# Altium PCB ESP32C6_module.PcbDoc (part 1 of 2)
Units mm, origin at the board's own origin, x right, y up, seen from the top; angles counter-clockwise.
Board outline 36.3 x 28.14 mm, 4 copper layers (TOP, GND, VCC, BOT), stack 1.586 mm thick; 77 components, 53 nets, 289 pads, 241 vias.
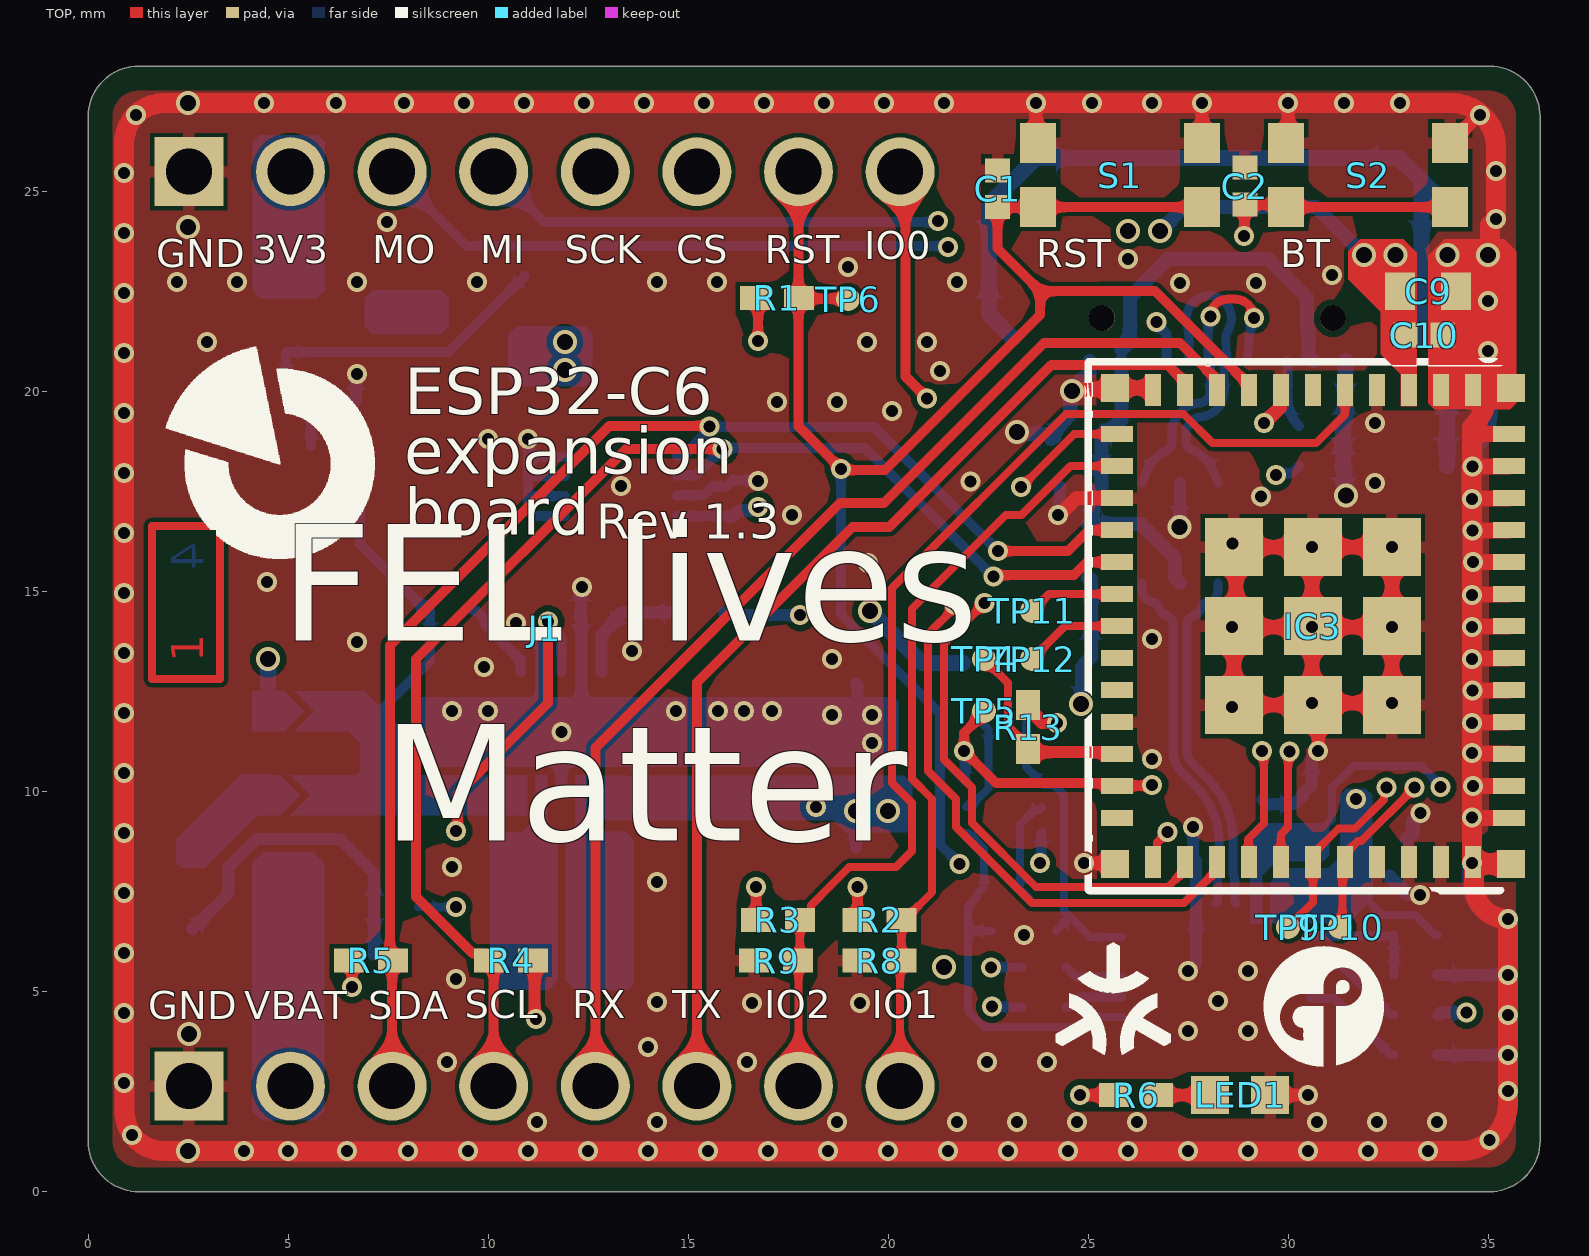
[diagram p0: TOP view]
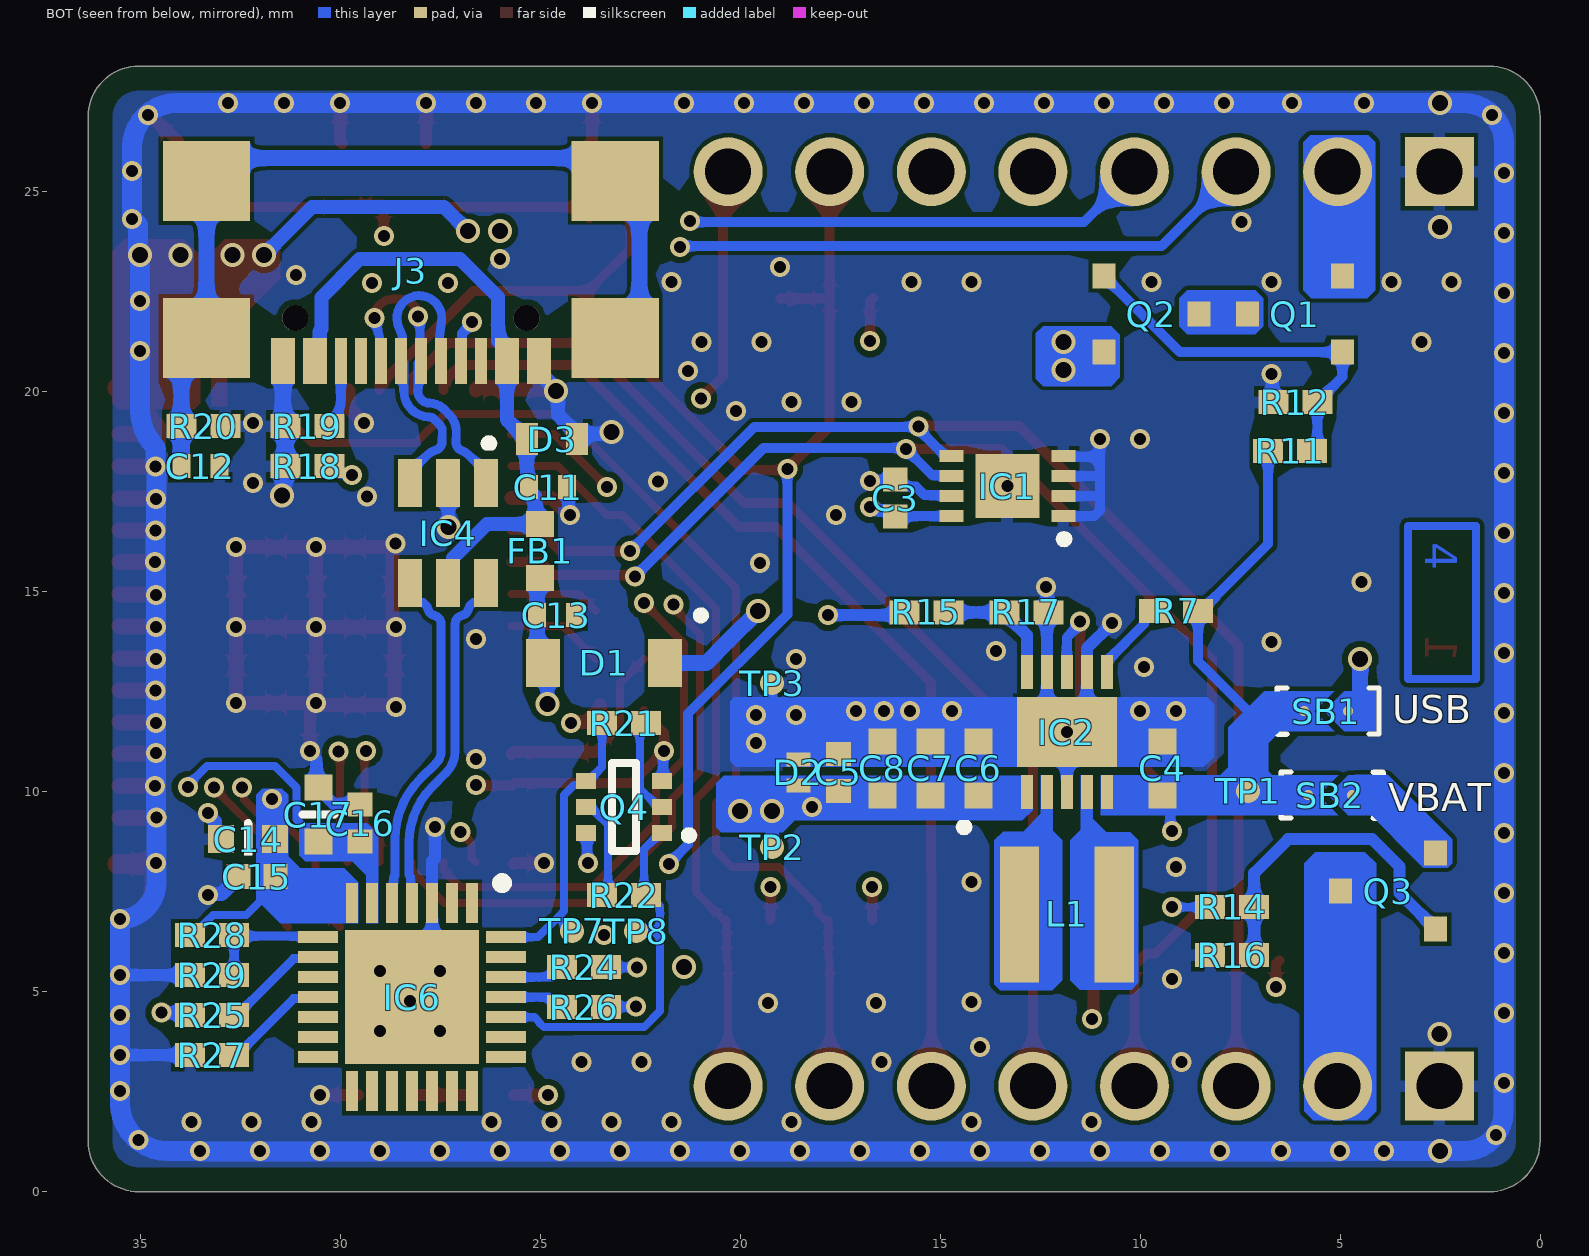
[diagram p1: BOT view, seen from below]
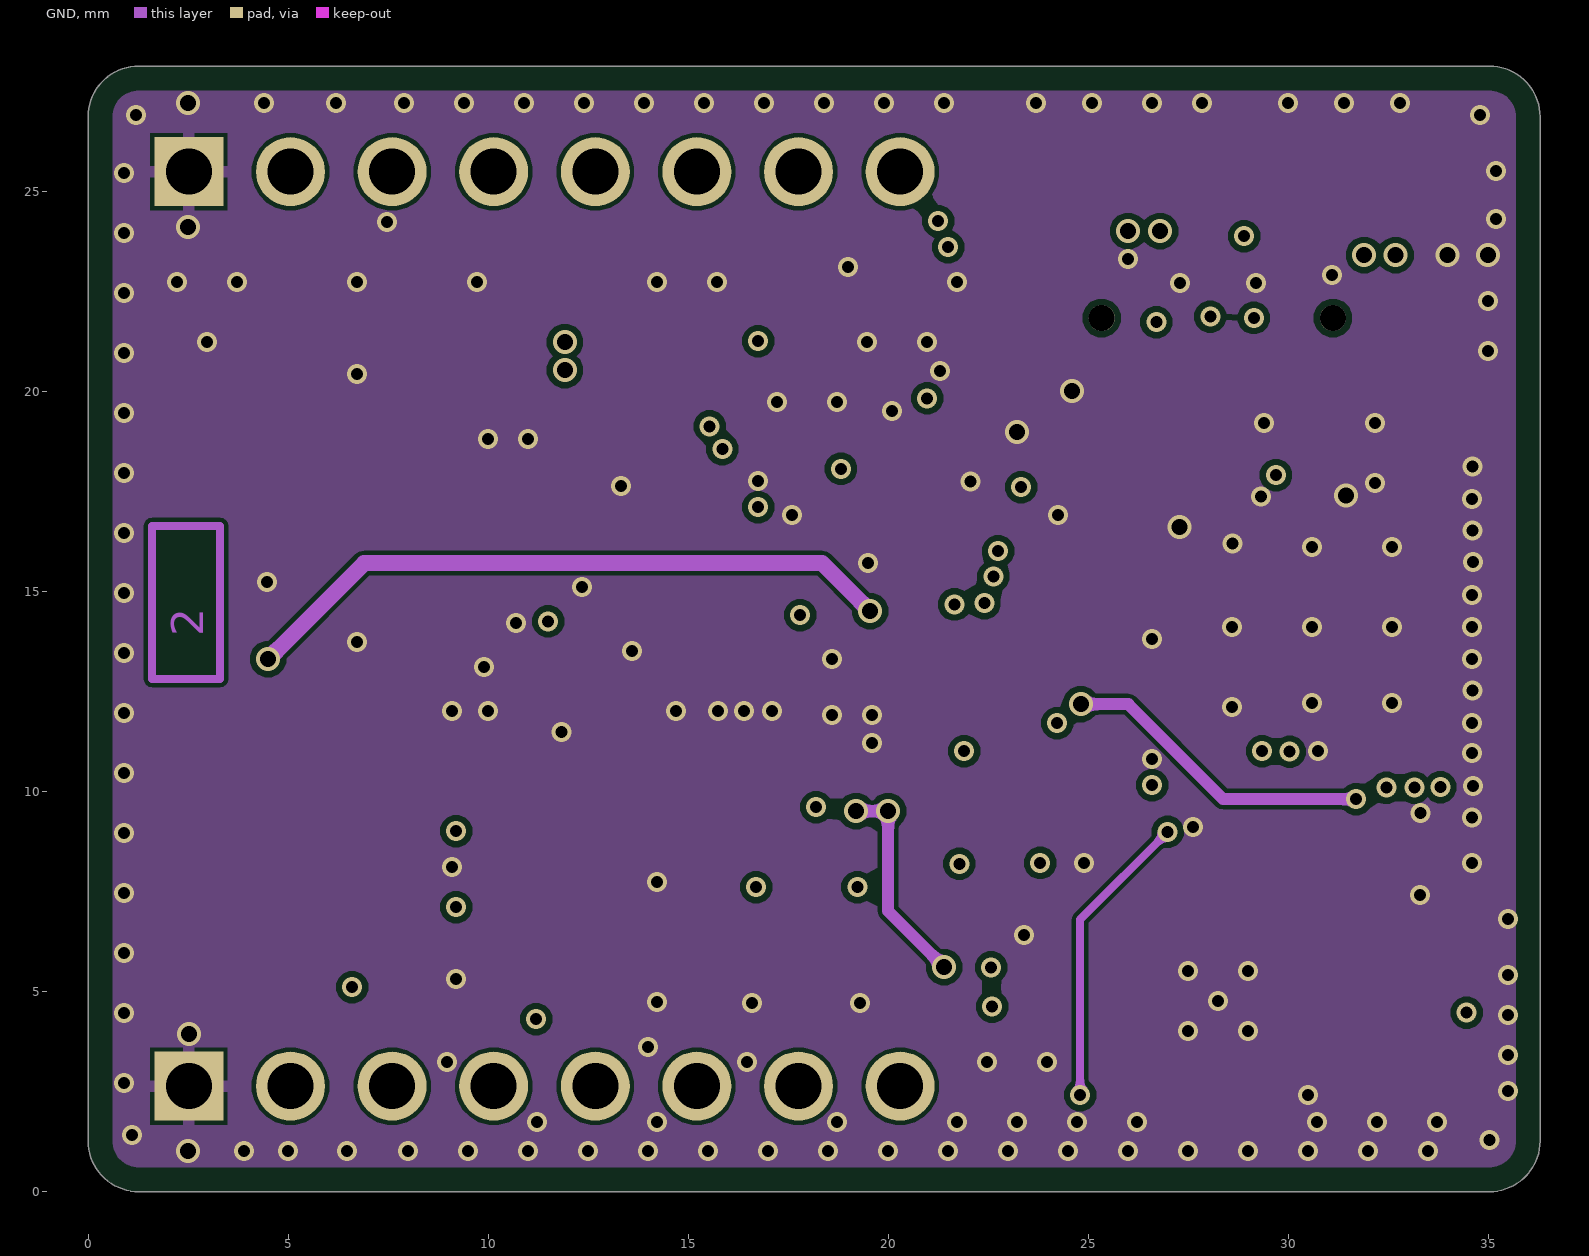
[diagram p2: GND]
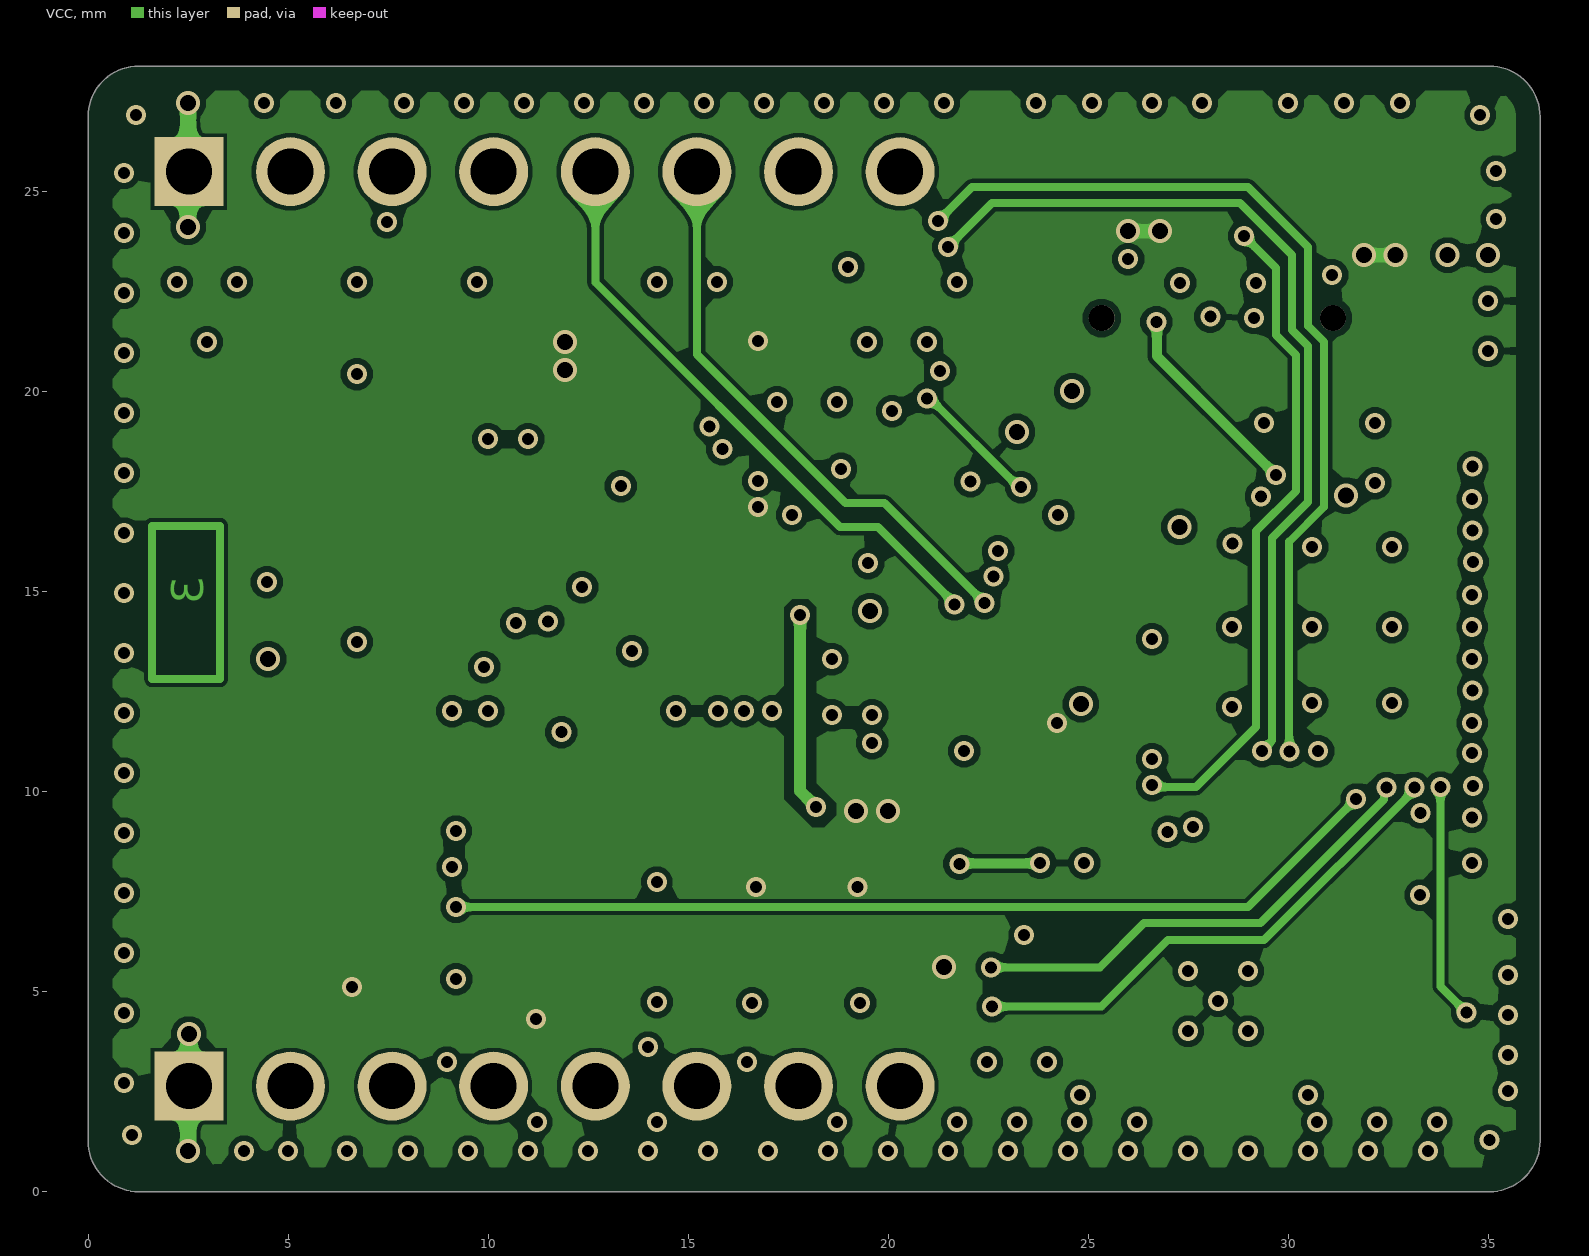
[diagram p3: VCC]

## Layer stack, top to bottom
Top Solder: solder mask 0.01, Solder Resist, Dk 3.5
TOP: signal copper 0.035
Dielectric 2: prepreg 0.2104, PP-006, Dk 4.1
GND: signal copper 0.0152
Dielectric 1: dielectric 1.065, FR-4, Dk 4.8
VCC: signal copper 0.0152
Dielectric 3: prepreg 0.2104, PP-006, Dk 4.1
BOT: signal copper 0.035
Bottom Solder: solder mask 0.01, Solder Resist, Dk 3.5

## Board outline
0,1.255 ccw(c1.27,1.255) 1.27,-0.015 35.03,-0.015 ccw(c35.03,1.255) 36.3,1.255 36.3,26.855 ccw(c35.03,26.855) 35.03,28.125 1.27,28.125 ccw(c1.27,26.855) 0,26.855

## Design rules (kind name [scope] priority, off if disabled: settings)
BoardOutlineClearance BoardOutlineClearance_ESP [HasFootprint('ESP32C6MINI1H8') Or HasFootprint('USB4110GFA')] p1: gap=0 ignorepadtopadclearanceinfootprint=FALSE
BoardOutlineClearance [All] p2: gap=0.2 ignorepadtopadclearanceinfootprint=FALSE except(0.6: Poly-OutlineEdge Region-OutlineEdge)
Clearance Clearance_USB [HasFootprint('GCT_USB4110GFA')] p1: gap=0.102 ignorepadtopadclearanceinfootprint=FALSE except(0.127: Arc-Via Track-Via SMDPad-Via THPad-Via Via-Via Via-Fill Via-Poly Via-Region Via-Text; 0.15: Arc-Hole Track-Hole SMDPad-Hole THPad-Hole Via-Hole Fill-Hole Poly-Hole Region-Hole Text-Hole)
Clearance [All] p2: gap=0.102 ignorepadtopadclearanceinfootprint=FALSE except(0.127: Arc-Via Track-Via SMDPad-Via THPad-Via Via-Via Via-Fill Via-Poly Via-Region Via-Text; 0.25: Arc-Hole Track-Hole SMDPad-Hole THPad-Hole Via-Hole Fill-Hole Poly-Hole Region-Hole Text-Hole)
ComponentClearance [All] p1: gap=0.102 collisioncheckmode=3 verticalgap=0.102 showdistances=TRUE
DiffPairsRouting [InDifferentialPairClass('USB')] p1: maxlimit=0.127 minlimit=0.102 mostfreqgap=0.127 toplayer_mingap=0.127 toplayer_minwidth=0.222 toplayer_maxwidth=0.222 toplayer_prefwidth=0.222 bottomlayer_mingap=0.127 bottomlayer_minwidth=0.222 bottomlayer_maxwidth=0.222 bottomlayer_prefwidth=0.222 impedanceprofiledriven=TRUE impedanceprofileid={F1036F3F-17FF-486A-911F-16CA4747983C} impedanceprofilevalue=90.000000 maxuncoupledlength=12.7
Height [All] p1: minheight=0 maxheight=1816.048 prefheight=12.7
HoleSize [All] p1: absolutevalues=TRUE maxlimit=6.3 minlimit=0.2 maxpercent=80.000 minpercent=20.000
HoleToHoleClearance [All] p1: gap=0.25 allowstackedmicrovias=FALSE
MinimumAnnularRing [All] p1: minimumring=0.076
MinimumSolderMaskSliver [All] p1: minsoldermaskwidth=0
PlaneClearance [All] p1: clearance=0.102
PlaneConnect PlaneConnectPowerPads [InPadClass('PowerPads')] p1: planeconnectstyle=Direct reliefexpansion=0.508 reliefentries=4 reliefconductorwidth=0.254 reliefairgap=0.254
PlaneConnect [All] p2: pad.planeconnectstyle=Relief pad.reliefexpansion=0.3 pad.reliefentries=4 pad.reliefconductorwidth=0.3 pad.reliefairgap=0.102 via.planeconnectstyle=Direct via.reliefexpansion=0.3 via.reliefentries=4 via.reliefconductorwidth=0.127 via.reliefairgap=0.127
PolygonConnect PolygonConnectPowerPads [All vs (InPadClass('PowerPads'))] p1: connectstyle=Direct reliefconductorwidth=0.254 reliefentries=4 polygonreliefangle="90 Angle" airgapwidth=0.254
PolygonConnect [All] p2: thpad.connectstyle=Relief thpad.reliefconductorwidth=0.3 thpad.reliefentries=4 thpad.polygonreliefangle="90 Angle" thpad.airgapwidth=0.102 smdpad.connectstyle=Relief smdpad.reliefconductorwidth=0.3 smdpad.reliefentries=4 smdpad.polygonreliefangle="90 Angle" smdpad.airgapwidth=0.102 via.connectstyle=Direct via.reliefconductorwidth=0.127 via.reliefentries=4 via.polygonreliefangle="90 Angle" via.airgapwidth=0.127
RoutingVias [All] p1: holewidth=0.2 width=0.45 viastyle="Through Hole" minholewidth=0.2 minwidth=0.45 maxholewidth=6.3 maxwidth=6.55
SilkToSilkClearance [All] p1: silktosilkclearance=0
SilkToSolderMaskClearance [IsPad] p1: minsilkscreentomaskgap=0.102 clearancetoexposedcopper=TRUE
SolderMaskExpansion [All] p1: expansion=0.075 istentingtop=FALSE
SupplyNets "Schematic Supply Nets_7" [InNet('STAB_3V3')] p1: voltage=0.000
SupplyNets "Schematic Supply Nets_6" [InNet('P3V3')] p2: voltage=0.000
SupplyNets "Schematic Supply Nets_5" [InNet('VBAT')] p3: voltage=0.000
SupplyNets "Schematic Supply Nets_3" [InNet('GND')] p4: voltage=0.000
SupplyNets "Schematic Supply Nets_2" [InNet('VBUS')] p5: voltage=0.000
SupplyNets "Schematic Supply Nets_1" [InNet('+5V')] p6: voltage=0.000
SupplyNets "Schematic Supply Nets" [InNet('3V3_IN')] p7: voltage=0.000
Width [All] p1: maxlimit=1816.048 minlimit=0.102 preferedwidth=0.102
20 further rules are at their usual default settings.

## Classes and differential pairs
component class U_Power: C4 C5 C6 C7 C8 D1 D2 IC2 L1 Q1 Q2 Q3 R7 R11 R12 R14 R15 R16 R17 SB1 SB2 TP1 TP2 TP3
differential pair class USB: USB1 USB2
net class USB: USB1_N USB1_P USB2_N USB2_P
component class U_USB-C: C11 C12 C13 C14 C15 C16 C17 D3 FB1 IC4 IC6 J3 R18 R19 R20 R24 R25 R26 R27 R28 R29
component class U_EEPROM_ID: C3 IC1
component class U_ESP32C6: C9 C10 IC3 Q4 R13 R21 R22 TP4 TP5 TP6 TP7 TP8 TP9 TP10 TP11 TP12
component class main: C1 C2 J1 LED1 R1 R2 R3 R4 R5 R6 R8 R9 S1 S2
differential pair USB2: +USB2_P -USB2_N
differential pair USB1: +USB1_P -USB1_N

## Components (designator, comment, footprint, x,y, rotation, side; value= is the part's Value field where it differs from the comment)
C1 "100nF" CAPC1005X70N 22.736,25.06 r270 top
C2 "100nF" CAPC1005X70N 28.919,25.125 r270 top
C3 "100nF" CAPC1005X70N 16.12,17.325 r270 bottom
C4 "10uF" GRM18X 9.444,10.566 r90 bottom
C5 "100nF" CAPC1005X70N 17.544,10.466 r270 bottom
C6 "10uF" GRM18X 14.044,10.566 r90 bottom
C7 "10uF" GRM18X 15.244,10.566 r90 bottom
C8 "10uF" GRM18X 16.444,10.566 r90 bottom
C9 "4.7uF" CAPC1608X90N 33.5,22.5 r0 top
C10 "100nF" CAPC1005X70N 33.4,21.4 r180 top
C11 "470nF" GRM15X 24.8,17.6 r0 bottom
C12 "10nF" GRM15X 33.495,18.125 r180 bottom
C13 "470nF" GRM15x 24.6,14.4 r0 bottom
C14 "10uF" GRM18x 32.3,8.8 r0 bottom
C15 "100nF" CAPC1005X70N 32.078,7.863 r180 bottom
C16 "100nF" CAPC1005X70N 29.5,9.2 r270 bottom
C17 "10uF" GRM18x 30.54,9.413 r90 bottom
D1 "RB168MM-40TFTR" RB168MM40TFTR 23.4,13.2 r270 bottom
D2 "SP3205-01ETG" SP320501ETG 18.544,10.466 r90 bottom
D3 "ESDA25P35-1U1M" ESDA25P351U1M 24.7,18.8 r0 bottom
FB1 "33R" BLM18SP221SN1B 25,16 r270 bottom
IC1 "M24C02-FMC6TG" M24C02FMC6TG 13.32,17.625 r90 bottom
IC2 "STBB1-APUR" SON50P300X300X100-11N-D 11.831,11.472 r90 bottom
IC3 "ESP32-C6-MINI-1-H8" ESP32C6MINI1H8 33.32,14.125 r270 top
IC4 "USBLC6-2SC6" SOT95P280X145-6N 27.3,16.45 r270 bottom
IC6 "CP2102N-A02-GQFN28R" QFN50P500X500X80-29N-D 28.2,4.85 r270 bottom
J1 "MicroBUS_conn" MICROBUS_HEADER 2.52,2.625 r0 top locked
J3 "USB4110GFA" GCT_USB4110GFA 28.23,21.825 r0 bottom
L1 "2.2uH" FP-XFL4020-MFG 11.831,6.919 r0 bottom
LED1 "150060GS75000" LEDC1608X80N 28.8,2.4 r180 top
Q1 "SSM3J358R,LF" SOTFL95P240X88-3N 6.132,21.925 r0 bottom
Q2 "SSM3J358R,LF" SOTFL95P240X88-3N 9.72,21.925 r180 bottom
Q3 "SSM3J358R,LF" SOTFL95P240X88-3N 3.8,7.5 r0 bottom
Q4 "BC847BDW1T1G" ONSC-SOT-363-6-419B-02_W_V 22.9,9.6 r0 bottom
R1 "100k" RESC1005X35N 17.22,22.325 r0 top
R2 "DNP" RESC1005X40N 19.785,6.78 r180 top
R3 "DNP" RESC1005X40N 17.245,6.78 r180 top
R4 "DNP" RESC1005X35N 10.57,5.764 r0 top
R5 "DNP" RESC1005X35N 7.07,5.764 r180 top
R6 "1k" RESC1005X35N 26.2,2.4 r0 top
R7 "1k" RESC1005X35N 9.1,14.5 r180 bottom
R8 "1M" RESC1005X40N 19.785,5.764 r0 top
R9 "1M" RESC1005X40N 17.201,5.764 r0 top
R11 "1k" RESC1005X35N 6.25,18.5 r180 bottom
R12 "1M" RESC1005X40N 6.12,19.725 r180 bottom
R13 "10k" RESC1005X35N 23.5,11.6 r270 top
R14 "1k" RESC1005X35N 7.7,7.1 r180 bottom
R15 "560k" RESC1005X40N 15.344,14.466 r0 bottom
R16 "1M" RESC1005X40N 7.7,5.9 r180 bottom
R17 "100k" RESC1005X40N 12.844,14.466 r180 bottom
R18 "5.1k" RESC1005X35N 30.82,18.125 r180 bottom
R19 "5.1k" RESC1005X35N 30.82,19.125 r180 bottom
R20 "1M" RESC1005X40N 33.42,19.125 r180 bottom
R21 "10k" RESC1005X35N 22.9,11.7 r0 bottom
R22 "10k" RESC1005X35N 22.9,7.4 r180 bottom
R24 "1k" RESC1005X35N 23.9,5.6 r0 bottom
R25 "1k" RESC1005X35N 33.2,4.4 r0 bottom
R26 "1k" RESC1005X35N 23.9,4.6 r0 bottom
R27 "NC" RESC1005X35N 33.2,3.4 r0 bottom
R28 "100k" RESC1005X40N 33.2,6.4 r180 bottom
R29 "330k" RESC1005X40N 33.2,5.4 r180 bottom
S1 "KMR731NG_LFS" KMR731NGLFS 25.8,25.4 r180 top
S2 "KMR731NG_LFS" KMR731NGLFS 32,25.4 r180 top
SB1 "SB_ON" SOLDER-BRIDGE_R0603-0R 5.3,12 r0 bottom value=0R
SB2 "SB_ON" SOLDER-BRIDGE_R0603-0R 5.2,9.9 r0 bottom value=0R
TP1 "TPAD6R" TP06R#1 7.3,10 r180 bottom
TP2 "TPAD6R" TP06R#2 19.2,8.6 r90 top
TP3 "TPAD6R" TP06R#2 19.2,12.7 r90 top
TP4 "TPAD6R" TP06R#1 22.4,13.3 r90 top
TP5 "TPAD6R" TP06R#1 22.4,12 r90 top
TP6 "TPAD6R" TP06R#1 19,22.3 r90 top
TP7 "TPAD6R" TP06R#3 24.2,6.6 r90 top
TP8 "TPAD6R" TP06R#2 22.6,6.5 r90 top
TP9 "TPAD6R" TP06R#1 30,6.6 r90 top
TP10 "TPAD6R" TP06R#1 31.3,6.6 r90 top
TP11 "TPAD6R" TP06R#1 23.6,14.5 r90 top
TP12 "TPAD6R" TP06R#1 23.6,13.3 r90 top

## Footprints (in the part's own frame and the unit in brackets; to place one, negate y for a bottom-side part, rotate by r counter-clockwise, add the part's x,y. Pads: shape width x height; smd on the part's side, far side on the other; paste and mask are expansions set on the pad)
BLM18SP221SN1B [mm]
  rect 0.65x0.7 smd: 1(-0.675,0) 2(0.675,0)
  body extent -0.8,-0.4 0.8,0.4, height 0.8
CAPC1005X70N [mm]
  rect 0.6x0.62 smd: 1(-0.46,0) 2(0.46,0)
  body extent -0.5,-0.25 0.5,0.25, height 0.25
CAPC1608X90N [mm]
  rect 0.75x0.94 smd: 1(-0.7,0) 2(0.7,0)
  body extent -0.8,-0.45 0.8,0.45, height 0.8
ESDA25P351U1M [mm]
  rect 0.55x0.8 smd: 1(0.625,0) 2(-0.625,0)
  body extent -0.8,-0.5 0.8,0.5, height 0.57
ESP32C6MINI1H8 [mm]
  rect 0.8x0.4 smd: 3(-5.9,-0.3) 5(-5.9,-1.9) 6(-5.9,-2.7) 8(-5.9,-4.3) 9(-5.9,-5.1) 10(-5.9,-5.9) 25(5.9,-6.7) 26(5.9,-5.9) 27(5.9,-5.1) 28(5.9,-4.3) 29(5.9,-3.5) 30(5.9,-2.7) 31(5.9,-1.9) NC(-5.9,-1.1) NC(-5.9,-3.5) NC(5.9,-1.1) NC(5.9,-0.3) NC(5.9,0.5) NC(5.9,1.3) PGND(-5.9,0.5) PGND(-5.9,1.3) PGND(-5.9,-6.7)
  rect 0.4x0.8 smd: 12(-4.8,-7.6) 13(-4,-7.6) 15(-2.4,-7.6) 16(-1.6,-7.6) 17(-0.8,-7.6) 18(0,-7.6) 19(0.8,-7.6) 20(1.6,-7.6) 22(3.2,-7.6) 23(4,-7.6) 24(4.8,-7.6) NC(2.4,-7.6) PGND(-4.8,2.2) PGND(-4,2.2) PGND(-3.2,2.2) PGND(-3.2,-7.6) PGND(-2.4,2.2) PGND(-1.6,2.2) PGND(-0.8,2.2) PGND(0,2.2) PGND(0.8,2.2) PGND(1.6,2.2) PGND(2.4,2.2) PGND(3.2,2.2) PGND(4,2.2) PGND(4.8,2.2)
  rect 0.7x0.7 smd: PGND(-5.95,2.25) PGND(-5.95,-7.65) PGND(5.95,2.25) PGND(5.95,-7.65)
  rect 1.45x1.45 smd: PGND(-1.975,-0.725) PGND(-1.975,-2.7) PGND(-1.975,-4.675) PGND(0,-0.725) PGND(0,-2.7) PGND(0,-4.675) PGND(1.975,-0.725) PGND(1.975,-2.7) PGND(1.975,-4.675)
  silkscreen extent -6.7,-8.4 6.7,2.08, body extent -6.6,-8.3 6.6,8.3, height 2.55
FP-XFL4020-MFG [mm]
  rect 0.98x3.4 smd paste+0 mask+0: 1(-1.185,0) 2(1.185,0)
  body extent -2,-2 2,2, height 2.23
GCT_USB4110GFA [mm]
  rect 0.6x1.15 smd: A1/B12(-3.2,1.075) A4/B9(-2.4,1.075) B1/A12(3.2,1.075) B4/A9(2.4,1.075)
  rect 0.3x1.15 smd: A5(-1.25,1.075) A6(-0.25,1.075) A7(0.25,1.075) A8(1.25,1.075) B5(1.75,1.075) B6(0.75,1.075) B7(-0.75,1.075) B8(-1.75,1.075)
  rect 2.18x2 smd: S1(-5.11,0.5) S2(5.11,0.5) S3(-5.11,-3.43) S4(5.11,-3.43)
  round 0.65 hole 0.65 unplated: ""(-2.89,0) ""(2.89,0)
  body extent -5.65,-6.28 5.65,1.42, height 3.26
GRM15X [mm]
  rect 0.45x0.6 smd: 1(-0.475,0) 2(0.475,0)
  body extent -0.5,-0.28 0.5,0.27, height 0.5
GRM15x [mm]
  rect 0.45x0.6 smd: 1(-0.475,0) 2(0.475,0)
  body extent -0.5,-0.28 0.5,0.27, height 0.5
GRM18X [mm]
  rect 0.65x0.7 smd: 1(-0.675,0) 2(0.675,0)
  body extent -0.8,-0.45 0.8,0.45, height 0.8
GRM18x [mm]
  rect 0.65x0.7 smd: 1(-0.675,0) 2(0.675,0)
  silkscreen extent -0.1,-0.5 0.1,0.4, body extent -0.8,-0.45 0.8,0.45, height 0.8
KMR731NGLFS [mm]
  rect 0.9x1 smd: 1(-2.05,-0.8) 2(2.05,-0.8) 3(2.05,0.8) 4(-2.05,0.8)
  body extent -2.3,-1.4 2.3,1.4, height 2.5
LEDC1608X80N [mm]
  rect 0.95x0.95 smd: 1(-0.75,0) 2(0.75,0)
  body extent -0.83,-0.4 0.77,0.4, height 0.7
M24C02FMC6TG [mm]
  rect 0.3x0.6 smd: 1(-0.75,-1.4) 2(-0.25,-1.4) 3(0.25,-1.4) 4(0.75,-1.4) 5(0.75,1.4) 6(0.25,1.4) 7(-0.25,1.4) 8(-0.75,1.4)
  rect 1.6x1.6 smd: 9(0,0)
  body extent -1,-1.5 1,1.5, height 0.7
MICROBUS_HEADER [mm]
  rect 1.725x1.725 hole 1.15: 1(0,22.86) 9(0,0)
  round 1.725 hole 1.15: 2(2.54,22.86) 3(5.08,22.86) 4(7.62,22.86) 5(10.16,22.86) 6(12.7,22.86) 7(15.24,22.86) 8(17.78,22.86) 10(2.54,0) 11(5.08,0) 12(7.62,0) 13(10.16,0) 14(12.7,0) 15(15.24,0) 16(17.78,0)
  body extent -1.27,-1.27 19.05,24.13, height 2.5
ONSC-SOT-363-6-419B-02_W_V [mm] "SOT23, 6-Leads, Body 2x1.25mm, Pitch 0.65mm"
  rect 0.5x0.4 smd: 1(-0.95,0.65) 2(-0.95,0) 3(-0.95,-0.65) 4(0.95,-0.65) 5(0.95,0) 6(0.95,0.65)
  silkscreen extent -0.3,-1.1 0.3,1.1, body extent -0.63,-1 0.63,1, height 1.1
QFN50P500X500X80-29N-D [mm]
  rect 1x0.3 smd: 1(-2.35,1.5) 2(-2.35,1) 3(-2.35,0.5) 4(-2.35,0) 5(-2.35,-0.5) 6(-2.35,-1) 7(-2.35,-1.5) 15(2.35,-1.5) 16(2.35,-1) 17(2.35,-0.5) 18(2.35,0) 19(2.35,0.5) 20(2.35,1) 21(2.35,1.5)
  rect 0.3x1 smd: 8(-1.5,-2.35) 9(-1,-2.35) 10(-0.5,-2.35) 11(0,-2.35) 12(0.5,-2.35) 13(1,-2.35) 14(1.5,-2.35) 22(1.5,2.35) 23(1,2.35) 24(0.5,2.35) 25(0,2.35) 26(-0.5,2.35) 27(-1,2.35) 28(-1.5,2.35)
  rect 3.35x3.35 smd: 29(0,0)
  silkscreen extent -2.97,2.12 -2.73,2.37, body extent -2.55,-2.55 2.55,2.55, height 0.8
RB168MM40TFTR [mm]
  rect 1.2x0.85 smd: 1(0,1.525) 2(0,-1.525)
  body extent -0.77,-1.72 0.77,1.72, height 0.75
RESC1005X35N [mm]
  rect 0.75x0.6 smd: 1(-0.55,0) 2(0.55,0)
  body extent -0.5,-0.25 0.5,0.25, height 0.35
RESC1005X40N [mm]
  rect 0.75x0.6 smd: 1(-0.55,0) 2(0.55,0)
  body extent -0.5,-0.25 0.5,0.25, height 0.4
SOLDER-BRIDGE_R0603-0R [mil]
  round 10 smd paste-393.7: 1(-19.69,0) 2(23.62,0)
  TOP region: -5.91,19.68 13.78,0 -5.91,-19.68 47.24,-19.68 47.24,19.68 -5.91,19.68
  TOP region: -47.24,-19.68 -47.24,19.68 -15.75,19.68 3.94,0 -15.75,-19.68 -47.24,-19.68
  silkscreen extent -50,-25 53,25, body extent -36,-20 36,20, height 22
SON50P300X300X100-11N-D [mm]
  rect 0.85x0.3 smd: 1(-1.5,1) 2(-1.5,0.5) 3(-1.5,0) 4(-1.5,-0.5) 5(-1.5,-1) 6(1.5,-1) 7(1.5,-0.5) 8(1.5,0) 9(1.5,0.5) 10(1.5,1)
  rect 1.75x2.5 smd: 11(0,0)
  body extent -1.55,-1.5 1.55,1.5, height 1
SOT95P280X145-6N [mm]
  rect 1.2x0.6 smd: 1(-1.25,0.95) 2(-1.25,0) 3(-1.25,-0.95) 4(1.25,-0.95) 5(1.25,0) 6(1.25,0.95)
  body extent -1.4,-1.45 1.4,1.45, height 1.2
SOTFL95P240X88-3N [mm]
  rect 0.575x0.62 smd: 1(-1.188,0.95) 2(-1.188,-0.95) 3(1.188,0)
  body extent -1.2,-1.45 1.2,1.45, height 0.88
SP320501ETG [mm]
  rect 0.35x0.6 smd: 1(-0.325,0) 2(0.325,0)
  body extent -0.5,-0.3 0.5,0.3, height 0.5
TP06R#1 [mm] "Testpoint, round, d=0.6mm"
  round 0.6 smd paste-1: 1(0,0)
TP06R#2 [mm] "Testpoint, round, d=0.6mm"
  round 0.6 smd far side paste-1: 1(0,0)
TP06R#3 [mm] "Testpoint, round, d=0.6mm"
  round 0.6 smd far side paste-1: 1(-0.1,0)

## Part data
C1 C2 C3 C5 C10 C15 C16: library part GRM155R61A104KA01D, "Capacitor", Manufacturer_Name="Murata Electronics", Mouser Part Number=81-GRM155R61A104KA01, Arrow Part Number=GRM155R61A104KA01D, Arrow Price/Stock=https://www.arrow.com/en/products/grm155r61a104ka01d/murata-manufacturing?utm_currency=USD&region=europe, Datasheet Link=https://search.murata.co.jp/Ceramy/image/img/A01X/G101/ENG/GRM155R61A104KA01-02A.pdf, Height=0.7mm, Manufacturer_Part_Number=GRM155R61A104KA01D, Mouser Price/Stock=https://www.mouser.co.uk/ProductDetail/Murata-Electronics/GRM155R61A104KA01D?qs=5bAuhL3RhmNZw0v59AqOJA%3D%3D
C4 C6 C7 C8 C14 C17: library part GRM188R61E106KA73D, "Capacitor", Manufacturer_Name="Murata Electronics", Mouser Part Number=81-GRM188R61E106KA3D, Arrow Part Number=GRM188R61E106KA73D, Arrow Price/Stock=https://www.arrow.com/en/products/grm188r61e106ka73d/murata-manufacturing?region=nac, Datasheet Link=https://search.murata.co.jp/Ceramy/image/img/A01X/G101/ENG/GRM188R61E106KA73-01A.pdf, Height=0.9mm, Manufacturer_Part_Number=GRM188R61E106KA73D, Mouser Price/Stock=https://www.mouser.co.uk/ProductDetail/Murata-Electronics/GRM188R61E106KA73D?qs=5aG0NVq1C4z8ebxPkQZf9A%3D%3D
C9: library part GRM188R61E475KE11J, "Capacitor", Manufacturer_Name="Murata Electronics", Mouser Part Number=81-GRM188R61E475KE1J, Arrow Part Number=GRM188R61E475KE11J, Arrow Price/Stock=https://www.arrow.com/en/products/grm188r61e475ke11j/murata-manufacturing, Datasheet Link=https://search.murata.co.jp/Ceramy/image/img/A01X/G101/ENG/GRM188R61E475KE11-01A.pdf, Height=0.9mm, Manufacturer_Part_Number=GRM188R61E475KE11J, Mouser Price/Stock=https://www.mouser.co.uk/ProductDetail/Murata-Electronics/GRM188R61E475KE11J?qs=hNud%2FORuBR3%2Fa9GLJFT8KA%3D%3D
C11 C13: library part GRM155R61H474KE11J, "Capacitor", Manufacturer_Name="Murata Electronics", Mouser Part Number=81-GRM155R61H474KE1J, Datasheet Link=https://search.murata.co.jp/Ceramy/image/img/A01X/G101/ENG/GRM155R61H474KE11-01A.pdf, Height=0.33mm, Manufacturer_Part_Number=GRM155R61H474KE11J, Mouser Price/Stock=https://www.mouser.co.uk/ProductDetail/Murata-Electronics/GRM155R61H474KE11J?qs=lEfY3O89AqlWLR2W%252BlOiGQ%3D%3D
C12: library part GRM155R71H103KA88D, "Capacitor", Manufacturer_Name="Murata Electronics", Mouser Part Number=81-GRM155R71H103KA8D, Arrow Part Number=GRM155R71H103KA88D, Arrow Price/Stock=https://www.arrow.com/en/products/grm155r71h103ka88d/murata-manufacturing?utm_currency=USD&region=nac, Datasheet Link=https://search.murata.co.jp/Ceramy/image/img/A01X/G101/ENG/GRM155R71H103KA88-01A.pdf, Height=0.33mm, Manufacturer_Part_Number=GRM155R71H103KA88D, Mouser Price/Stock=https://www.mouser.co.uk/ProductDetail/Murata-Electronics/GRM155R71H103KA88D?qs=Dfh4SrgScWxOVlCuzd3ZyQ%3D%3D
D1: "Schottky Diode", Manufacturer_Name="ROHM Semiconductor", Mouser Part Number=755-RB168MM-40TFTR, Datasheet Link=https://www.rohm.com/products/diodes/schottky-barrier-diodes/ultra-low-ir/rb168mm-40tf-product#productDetail, Height=0.9mm, Manufacturer_Part_Number=RB168MM-40TFTR, Mouser Price/Stock=https://www.mouser.co.uk/ProductDetail/ROHM-Semiconductor/RB168MM-40TFTR?qs=4v%252BiZTmLVHGRj2i7xya%2FtQ%3D%3D
D2: "Diode ESD (Uni-directional)", Manufacturer_Name=LITTELFUSE, Mouser Part Number=576-SP3205-01ETG, Arrow Part Number=SP3205-01ETG, Arrow Price/Stock=https://www.arrow.com/en/products/sp3205-01etg/littelfuse?utm_currency=USD&region=nac, Datasheet Link=https://4donline.ihs.com/images/VipMasterIC/IC/LFSI/LFSI-S-A0010724013/LFSI-S-A0010724013-1.pdf?hkey=6D3A4C79FDBF58556ACFDE234799DDF0, Height=0.55mm, Manufacturer_Part_Number=SP3205-01ETG, Mouser Price/Stock=https://www.mouser.co.uk/ProductDetail/Littelfuse/SP3205-01ETG?qs=vHuUswq2%252BswfNhVD4WkB%252BQ%3D%3D
D3: "TVS Diode (Uni-directional)", Manufacturer_Name=STMicroelectronics, Mouser Part Number=511-ESDA25P35-1U1M, Arrow Part Number=ESDA25P35-1U1M, Arrow Price/Stock=https://www.arrow.com/en/products/esda25p35-1u1m/stmicroelectronics?utm_currency=USD&region=europe, Datasheet Link=https://www.st.com/resource/en/datasheet/esda25p35-1u1m.pdf, Height=0.6mm, Manufacturer_Part_Number=ESDA25P35-1U1M, Mouser Price/Stock=https://www.mouser.co.uk/ProductDetail/STMicroelectronics/ESDA25P35-1U1M?qs=aVyJF2WnouQUWqgNP85ZrA%3D%3D
FB1: library part BLM18SG330SN1D, "Ferrite Bead", Manufacturer_Name="Murata Electronics", Mouser Part Number=81-BLM18SG330SN1D, Arrow Part Number=BLM18SG330SN1D, Arrow Price/Stock=https://www.arrow.com/en/products/blm18sg330sn1d/murata-manufacturing, Datasheet Link=http://www.murata.com/~/media/webrenewal/support/library/catalog/products/emc/emifil/c31e.ashx?la=en-gb, Height=0.95mm, Manufacturer_Part_Number=BLM18SG330SN1D, Mouser Price/Stock=https://www.mouser.co.uk/ProductDetail/Murata-Electronics/BLM18SG330SN1D?qs=7EBvPakHacUT88safgvlfQ%3D%3D
IC1: "Integrated Circuit", Manufacturer_Name=STMicroelectronics, Mouser Part Number=511-M24C02-FMC6TG, Arrow Part Number=M24C02-FMC6TG, Arrow Price/Stock=https://www.arrow.com/en/products/m24c02-fmc6tg/stmicroelectronics?region=nac, Datasheet Link=https://www.st.com/resource/en/datasheet/m24c01-r.pdf, Height=0.6mm, Manufacturer_Part_Number=M24C02-FMC6TG, Mouser Price/Stock=https://www.mouser.co.uk/ProductDetail/STMicroelectronics/M24C02-FMC6TG?qs=WHlX%252B%252B9%2FRwB%252BxJ8bQxWbzQ%3D%3D
IC2: "Integrated Circuit", Manufacturer_Name=STMicroelectronics, Mouser Part Number=511-STBB1-APUR, Arrow Part Number=STBB1-APUR, Arrow Price/Stock=https://www.arrow.com/en/products/stbb1-apur/stmicroelectronics?utm_currency=USD&region=nac, Datasheet Link=https://www.st.com/resource/en/datasheet/stbb1-axx.pdf, Height=1mm, Manufacturer_Part_Number=STBB1-APUR, Mouser Price/Stock=https://www.mouser.co.uk/ProductDetail/STMicroelectronics/STBB1-APUR?qs=XoSzFQ8izGZfZqn873o0Mg%3D%3D
IC3: "Integrated Circuit", Manufacturer_Name="Espressif Systems", Mouser Part Number=356-ESP32C6MINI1H8, Datasheet Link=https://www.mouser.ph/ProductDetail/Espressif-Systems/ESP32-C6-MINI-1-H8?qs=olJun0bQHM8q1UR%2FHSWi2A%3D%3D, Height=2.55mm, Manufacturer_Part_Number=ESP32-C6-MINI-1-H8, Mouser Price/Stock=https://www.mouser.co.uk/ProductDetail/Espressif-Systems/ESP32-C6-MINI-1-H8?qs=olJun0bQHM8q1UR%2FHSWi2A%3D%3D
IC4: "Integrated Circuit", Manufacturer_Name=STMicroelectronics, Mouser Part Number=511-USBLC6-2SC6, Arrow Part Number=USBLC6-2SC6, Arrow Price/Stock=https://www.arrow.com/en/products/usblc6-2sc6/stmicroelectronics?utm_currency=USD&region=europe, Datasheet Link=http://www.st.com/st-web-ui/static/active/en/resource/technical/document/datasheet/CD00050750.pdf, Height=1.45mm, Manufacturer_Part_Number=USBLC6-2SC6, Mouser Price/Stock=https://www.mouser.co.uk/ProductDetail/STMicroelectronics/USBLC6-2SC6?qs=po45yt2pPpu%2FhNIlwQdTlg%3D%3D
IC6: "Integrated Circuit", Manufacturer_Name="Silicon Labs", Mouser Part Number=634-CP2102NA02QFN28R, Arrow Part Number=CP2102N-A02-GQFN28R, Arrow Price/Stock=https://www.arrow.com/en/products/cp2102n-a02-gqfn28r/silicon-labs?utm_currency=USD&region=nac, Datasheet Link=https://www.silabs.com/documents/public/data-sheets/cp2102n-datasheet.pdf, Height=0.8mm, Manufacturer_Part_Number=CP2102N-A02-GQFN28R, Mouser Price/Stock=https://www.mouser.co.uk/ProductDetail/Silicon-Labs/CP2102N-A02-GQFN28R?qs=u16ybLDytRag4qKvSH3fTw%3D%3D
J1: "Connector", Manufacturer_Name=Harwin, Manufacturer_Part_Number=M20-9730845, Mouser Part Number=855-M20-9730845, Datasheet Link=https://cdn.harwin.com/pdfs/M20-973.pdf, Height=9.54mm, Mouser Price/Stock=https://www.mouser.co.uk/ProductDetail/Harwin/M20-9730845?qs=%252Bk6%2F5FB6qrnRfgIEPS4Dkw%3D%3D
J3: "USB-C (USB TYPE-C) USB 2.0 Receptacle Connector 24 (16+8 Dummy) Position Surface Mount, Right Angle", Package=None, Check_prices=https://www.snapeda.com/parts/USB4110GFA/Global+Connector+Technology/view-part/?ref=eda, MF="Global Connector Technology", MP=USB4110GFA, SnapEDA_Link=https://www.snapeda.com/parts/USB4110GFA/Global+Connector+Technology/view-part/?ref=snap
L1: library part CMP-2000-05090-4, "INDUCTOR, 2.2UH, 8A, 20%, 38MHZ, REEL", Case/Package=SMD/SMT, DC Resistance (DCR)=23.5mR, Inductance Tolerance=20%, Max DC Current=8A, Max Operating Temperature=125°C, Min Operating Temperature=-40°C, Saturation Current=3.1A, Self Resonant Frequency=38MHz, Test Frequency=100kHz, Core Material=Composite, Height=2.1mm, Inductance=2.2uH, Lead Free="Contains Lead", Length=4.3mm, Mount="Surface Mount", Packaging="Tape and Reel", REACH SVHC="No SVHC", RMS Current (Irms)=8A, RoHS Compliant=Yes, Series=XFL4020, Shielding=Shielded, Termination=SMD/SMT, Tolerance=20%, Width=4.3mm
LED1: "LED", Manufacturer_Name="Wurth Elektronik", Mouser Part Number=710-150060GS75000, Datasheet Link=https://componentsearchengine.com/Datasheets/2/150060GS75000.pdf, Height=0.8mm, Manufacturer_Part_Number=150060GS75000, Mouser Price/Stock=https://www.mouser.co.uk/ProductDetail/Wurth-Elektronik/150060GS75000?qs=LlUlMxKIyB0UYkq5lDO8nA%3D%3D
Q1 Q2 Q3: "MOSFET (P-Channel)", Manufacturer_Name=Toshiba, Mouser Part Number=757-SSM3J358RLF, Arrow Part Number=SSM3J358R,LF, Arrow Price/Stock=https://www.arrow.com/en/products/ssm3j358rlf/toshiba?region=nac, Datasheet Link=https://toshiba.semicon-storage.com/ap-en/product/mosfet/detail.SSM3J358R.html, Height=0.88mm, Manufacturer_Part_Number=SSM3J358R,LF, Mouser Price/Stock=https://www.mouser.co.uk/ProductDetail/Toshiba/SSM3J358RLF?qs=HXFqYaX1Q2xwvCtt1GGmkw%3D%3D
Q4: library part CMP-1048-00875-1, "Dual General Purpose Transistors, NPN, 6-Pin SOT-363, Pb-Free, Tape and Reel", Manufacturer="On Semiconductor", ComponentLink1Description="Manufacturer URL", ComponentLink1URL=http://www.onsemi.com/, ComponentLink2Description=Datasheet, ComponentLink2URL=http://www.onsemi.cn/pub_link/Collateral/BC846BDW1T1-D.PDF, ComponentLink3Description="Package Specification", ComponentLink3URL=http://www.onsemi.com/pub_link/Collateral/NTJD4001N-D.PDF, DatasheetVersion="Rev. 9", fT Min (MHz)=100, IC Continuous (A)=0.1, Mounting Technology="Surface Mount", PackageDescription="6-Pin Small Outline Transistor, Body 2 x 1.25 mm, Pitch 0.65 mm", PackageReference=SOT-363-6-419B-02_W, PackageVersion="Rev. W, 01/2006", Packing="Tape and Reel", PartNumber=BC847BDW1T1G, Polarity="Dual NPN", RoHS=TRUE
R1: library part RT0402FRE07100KL, "Resistor", Manufacturer_Name=KEMET, Mouser Part Number=603-RT0402FRE07100KL, Arrow Part Number=RT0402FRE07100KL, Arrow Price/Stock=https://www.arrow.com/en/products/rt0402fre07100kl/yageo, Datasheet Link=https://www.yageo.com/upload/media/product/productsearch/datasheet/rchip/PYu-RT_1-to-0.01_RoHS_L_11.pdf, Height=0.35mm, Manufacturer_Part_Number=RT0402FRE07100KL, Mouser Price/Stock=https://www.mouser.co.uk/ProductDetail/YAGEO/RT0402FRE07100KL?qs=BXCcY9r%252B08CxTvf5JB1kiw%3D%3D
R2 R3 R8 R9 R12 R16 R20: library part RC0402FR-071ML, "Resistor", Manufacturer_Name=YAGEO, Mouser Part Number=603-RC0402FR-071ML, Arrow Part Number=RC0402FR-071ML, Arrow Price/Stock=https://www.arrow.com/en/products/rc0402fr-071ml/yageo?region=nac, Datasheet Link=https://componentsearchengine.com/Datasheets/2/RC0402FR-071ML.pdf, Height=0.4mm, Manufacturer_Part_Number=RC0402FR-071ML, Mouser Price/Stock=https://www.mouser.co.uk/ProductDetail/YAGEO/RC0402FR-071ML?qs=V1yeUXFNrknfoI4987wfBQ%3D%3D
R4 R5 R18 R19: library part RT0402FRE075K1L, "Resistor", Manufacturer_Name=YAGEO, Datasheet Link=https://www.yageo.com/upload/media/product/app/datasheet/rchip/pyu-rt_1-to-0.01_rohs_l.pdf, Height=0.35mm, Manufacturer_Part_Number=RT0402FRE075K1L, Mouser Part Number=RT0402FRE075K1L, Mouser Price/Stock=https://www.mouser.co.uk/ProductDetail/YAGEO/RT0402FRE07100RL?qs=BXCcY9r%252B08AcvLZjF7vcwQ%3D%3D
R6 R7 R11 R14 R24 R25 R26: library part RT0402FRE071KL, "Resistor", Arrow Part Number=RT0402FRE07100KL, Manufacturer_Name=KEMET, Arrow Price/Stock=https://www.arrow.com/en/products/rt0402fre07100kl/yageo, Datasheet Link=https://www.yageo.com/upload/media/product/productsearch/datasheet/rchip/PYu-RT_1-to-0.01_RoHS_L_11.pdf, Height=0.35mm, Manufacturer_Part_Number=RT0402FRE071KL, Mouser Part Number=RT0402FRE071KL, Mouser Price/Stock=https://www.mouser.co.uk/ProductDetail/YAGEO/RT0402FRE07100KL?qs=BXCcY9r%252B08CxTvf5JB1kiw%3D%3D
R13 R21 R22 R27: library part RT0402FRE0710KL, "Resistor", Arrow Part Number=RT0402FRE07100KL, Manufacturer_Name=KEMET, Mouser Part Number=603-RT0402FRE0710KL, Arrow Price/Stock=https://www.arrow.com/en/products/rt0402fre07100kl/yageo, Datasheet Link=https://cz.mouser.com/datasheet/2/447/PYu_RT_1_to_0_01_RoHS_L_15-3461507.pdf, Height=0.35mm, Manufacturer_Part_Number=RT0402FRE0710KL, Mouser Price/Stock=https://www.mouser.co.uk/ProductDetail/YAGEO/RT0402FRE07100KL?qs=BXCcY9r%252B08CxTvf5JB1kiw%3D%3D
R15: library part RE0402BRE07560KL, "Resistor", Manufacturer_Name=YAGEO, Datasheet Link=https://cz.mouser.com/datasheet/3/508/1/pyu-re_105_rohs_l.pdf, Height=0.4mm, Manufacturer_Part_Number=RE0402BRE07560KL
R17 R28: library part RC0402BR-07100KL, "Resistor", Manufacturer_Name=YAGEO, Datasheet Link=https://cz.mouser.com/datasheet/2/447/PYu_RC_Group_51_RoHS_L_12-3368608.pdf, Height=0.4mm, Manufacturer_Part_Number=RC0402BR-07100KL
R29: library part RC0402BR-07330KL, "Resistor", Manufacturer_Name=YAGEO, Datasheet Link=https://cz.mouser.com/datasheet/2/447/PYu_RC_Group_51_RoHS_L_11-1984063.pdf, Height=0.4mm, Manufacturer_Part_Number=RC0402BR-07330KL
S1 S2: "Switch", Arrow Part Number="KMR731NG LFS", Manufacturer_Name="C & K COMPONENTS", Mouser Part Number=611-KMR731NGLFS, Arrow Price/Stock=https://www.arrow.com/en/products/kmr731nglfs/ck, Datasheet Link=https://www.ckswitches.com/media/1908/kmr7.pdf, Manufacturer_Part_Number="KMR731NG LFS", Mouser Price/Stock=https://www.mouser.com/Search/Refine.aspx?Keyword=611-KMR731NGLFS
SB1 SB2: library part MCD-00071, "Resistor, 0R, SB0603, 5%, 0.1W", Manufacturer=YAGEO, Manufacturer_HQ_COO=Unknown, Manufacturer_Part_Number=RC0603JR-070RL, Package=0603, Component_Country_Of_Origin=China, ComponentLink1URL=http://tunmcdsvn.tun.st.com/Component_Documentation_Library/Trunk/Resistor/YAGEO_RC_Series, ID=2521, Internal_Part_Number=MCD-00071, Order_Code_Digikey=311-0.0GRTR-ND, Order_Code_Farnell=2421846, Order_Code_RS=199-5647, Part_Preference=Recommended, Part_Type=Resistor, ShowFields=YES, Status=Released
TP1 TP2 TP3 TP4 TP5 TP6 TP7 TP8 TP9 TP10 TP11 TP12: library part CMP-00028-00002-2, "0.6mm round", Pins=1

## Via types
v1: diameter 0.5, hole 0.3, TOP to BOT, tented both sides, 203 vias
v2: diameter 0.6, hole 0.4, TOP to BOT, tented both sides, 22 vias
v3: diameter 0.5, hole 0.3, TOP to BOT, 16 vias

## Nets (pads, with @x,y where several pads share a name; then routed paths per layer and width w, separated by ;. In a path a pad name is that pad's centre, name@x,y a point inside that pad or via, vN(x,y) a via of type N, cw(c..) or ccw(c..) an arc to the next point about the centre after c; other vN are vias at no path point)
3V3_IN: J1.2 Q1.2
+5V: C13.2 C14.1 C15.2 D1.2 FB1.2 IC6.7 R14.1 R28.1 | length 40.6
  GND w0.3: v2(24.817,12.173) 26.004,12.173 28.378,9.8 v1(31.7,9.8)
  VCC w0.2: v1(9.2,7.1) 29,7.1 v1(31.7,9.8)
  BOT w0.2: R14.1 v1(9.2,7.1) ; C15.2 C15.2@31.625,7.857 ; v1(31.7,9.8) 31.7,9.719 31.625,9.644 C15.2@31.625,7.857 ; R28.1 33.675,6.4 33.324,6.751 33.173,6.902 32.348,6.902 31.818,7.432 31.818,7.56 31.8,7.578 31.8,7.682 C15.2@31.625,7.857
  BOT w0.3: v2(24.817,12.173) 24.817,13.092 D1.2
  BOT w0.35: D1.2 25.075,13.35 C13.2 25.075,15.25 ccw(c25,15.25) FB1.2
BOOT: C2.2 IC3.23 Q4.3 S2.3 S2.4 TP5.1 | length 29.5
  TOP w0.25: TP5.1 22.4,11.95 21.9,11.45 v1(21.9,11) 22.7,10.2 25.645,10.2 IC3.23 25.732,10.138 26.588,10.138 v1(26.6,10.15) ; v1(28.9,23.875) 28.91,23.885 28.91,24.656 C2.2 29.885,24.665 S2.3 S2.4
  VCC w0.2: v1(26.6,10.15) 26.65,10.1 27.7,10.1 29.2,11.6 29.2,16.5 30.197,17.497 30.197,20.903 29.7,21.4 29.7,23.075 v1(28.9,23.875)
  BOT w0.25: v1(21.9,11) 21.925,10.975 21.925,10.275 Q4.3
CS: IC3.26 J1.6 | length 26.9
  TOP w0.2: v1(22.409,14.702) 21.4,13.694 21.4,10.793 22.1,10.093 22.1,9.2 23.701,7.599 26.993,7.599 27.42,8.025 IC3.26
  VCC w0.2: J1.6 15.22,20.917 18.937,17.2 19.911,17.2 v1(22.409,14.702)
DTR: IC6.28 Q4.4 R21.2 TP7.1 | length 7.5
  BOT w0.2: R21.2 23.45,10.6 23.9,10.15 24.15,10.15 24.4,9.9 24.4,7 24.548,6.852 ; TP7.1 24.548,6.848 24.548,6.852 ; IC6.28 25.5,6.35 25.05,6.35 24.548,6.852
ESP_EN: C1.2 IC3.8 J1.7 Q4.6 R1.2 S1.3 S1.4 TP6.1 | length 44.4
  TOP w0.25: J1.7 R1.2@17.76,22.335 ; v1@18.821,18.025 19.925,18.025 23.8,21.9 23.8,22.5 ; v1(18.821,18.058) 17.76,19.119 R1.2@17.76,22.335 ; TP6.1 18.987,22.313 17.783,22.313 R1.2 R1.2@17.76,22.335 ; S1.3 S1.4 ; S1.3@23.77,24.325 23.495,24.6 C1.2 22.736,23.564 23.8,22.5 ; IC3.8 29.02,20.225 28.945,20.3 28.873,20.3 26.673,22.5 23.8,22.5
  VCC w0.25: v1(21.783,8.183) 21.792,8.192 23.792,8.192 v1(23.804,8.204)
  BOT w0.25: v1(18.821,18.058) 18.821,14.416 21.3,11.937 21.3,8.666 v1(21.783,8.183) ; v1(23.804,8.204) 23.827,8.227 23.827,8.927 Q4.6
FB: IC2.10 R15.1 R17.1 | length 3.2
  BOT w0.3: IC2.10 12.831,13.903 13.169,14.241 13.169,14.316 13.319,14.466 R15.1
GND: C1.1 C2.1 C3.1 C4.2 C5.1 C6.2 C7.2 C8.2 C9.2 C10.1 C11.1 C12.2 C13.1 C14.2 C15.1 C16.1 C17.2 D2.2 D3.2 IC1.1 IC1.2 IC1.3 IC1.4 IC1.7 IC1.9 IC2.3 IC2.7 IC2.9 IC2.11 IC3.NC IC3.PGND IC4.2 IC6.3 IC6.29 J1.1 J1.9 J3.A1/B12 J3.B1/A12 LED1.1 R8.1 R9.1 R12.1 R16.1 R17.2 R18.1 R19.1 R20.2 R27.2 R29.1 S1.1 S1.2 S2.1 S2.2 TP3.1 | length 333
  TOP w0.3: v1(23.7,27.2) 23.7,26.25 S1.2 ; v1(24.9,8.2) 25.61,8.2 cw(c25.61,8.115) IC3.PGND@25.67,8.175 ; IC3.PGND@26.61,20.009 26.607,20.012 IC3.PGND@26.62,20.025 ; S1.1 v1(27.85,27.2) ; LED1.1 v1(30.5,2.4) ; S2.2 30,26.25 v1(30,27.2) ; v3(30.6,12.2) 30.635,12.165 30.75,12.05 v1(30.75,11) ; S2.1 34.05,26.25 34.35,26.55 34.396,26.55 34.746,26.9 v1(34.8,26.9)
  TOP w0.35: v1(24.25,16.902) 24.291,16.902 24.714,17.325 IC3.PGND@25.72,17.325 ; v2(24.6,20) 24.638,20.038 25.632,20.038 25.67,20.075 26.595,20.075 26.607,20.064 IC3.PGND@26.607,20.012 ; v3(28.6,14.1) IC3.PGND@28.645,14.1 ; v3(28.616,16.195) 28.71,16.1 v3(30.6,16.1) ; IC3.PGND@28.695,16.05 28.695,14.175 28.645,14.125 IC3.PGND@28.645,14.1 ; v1(29.396,19.204) 29.404,19.204 29.795,19.595 29.795,20 IC3.NC@29.82,20.025 ; IC3.PGND@30.62,14.125 30.62,14.12 v3(30.6,14.1) ; IC3.PGND@30.62,16.1 v3(30.6,16.1) ; IC3.PGND@30.62,16.1 IC3.PGND@32.595,16.1 ; IC3.PGND@32.595,14.125 IC3.PGND@32.6,14.12 ; IC3.PGND@32.595,16.1 IC3.PGND@32.6,16.095 ; v3(32.6,16.1) IC3.PGND@32.6,16.095 ; IC3.PGND@28.645,14.1 v3(30.6,14.1) ; IC3.PGND@28.645,14.1 28.645,12.15 IC3.PGND@30.62,12.15 ; v3(30.6,14.1) v3(32.6,14.1) ; v3(30.6,14.1) v3(30.6,16.1) ; v3(30.6,14.1) v3(30.6,12.2) 30.6,12.17 IC3.PGND@30.62,12.15 ; IC3.PGND@30.62,12.15 30.635,12.165 30.67,12.2 32.545,12.2 32.595,12.15 32.595,12.195 v3(32.6,12.2) v3(32.6,14.1) ; v3(32.6,14.1) IC3.PGND@32.6,14.12 ; IC3.PGND@32.6,14.12 IC3.PGND@32.6,16.095
  TOP w0.4: v1@34.612,10.938 35.508,10.938 IC3.PGND@35.52,10.925 ; v1@34.613,11.713 35.507,11.713 IC3.PGND@35.52,11.725 ; v1@34.613,13.313 35.507,13.313 IC3.PGND@35.52,13.325 ; v1@34.613,14.113 35.507,14.113 IC3.PGND@35.52,14.125 ; v1@34.613,14.913 35.507,14.913 IC3.PGND@35.52,14.925 ; v1(34.613,16.513) 35.507,16.513 IC3.PGND@35.52,16.525 ; v1@34.613,17.313 35.507,17.313 IC3.PGND@35.52,17.325 ; v1(34.613,18.113) 35.507,18.113 IC3.PGND@35.52,18.125 ; v1@34.615,9.325 IC3.PGND@35.52,9.325 ; v1@34.619,12.519 35.514,12.519 IC3.PGND@35.52,12.525 ; v1(34.625,10.125) IC3.PGND@35.52,10.125 ; v1(34.625,15.725) IC3.PGND@35.52,15.725 ; 34.761,18.925 IC3.PGND@35.52,18.925
  TOP w0.5: v1@3.892,1 v2(2.5,1) 1.9,1 cw(c1.9,1.988) 0.912,1.988 0.912,2.688 v1(0.9,2.7) v1(0.9,4.45) v1(0.9,5.95) v1(0.9,7.45) v1(0.9,8.95) v1(0.9,10.45) v1(0.9,11.95) v1(0.9,13.45) v1(0.9,14.95) v1(0.9,16.45) v1(0.9,17.95) v1(0.9,19.45) v1(0.9,20.95) v1(0.9,22.45) v1(0.9,23.95) v1(0.9,25.45) 0.9,26.2 cw(c1.9,26.2) 1.9,27.2 v2(2.5,27.2) v1(4.4,27.2) v1(6.2,27.2) v1(7.9,27.2) v1(9.4,27.2) v1(10.9,27.2) v1(12.4,27.2) v1(13.9,27.2) v1(15.4,27.2) v1(16.9,27.2) v1(18.4,27.2) v1(19.9,27.2) v1(21.4,27.2) v1(23.7,27.2) v1(25.1,27.2) v1(26.6,27.2) v1(27.85,27.2) v1(30,27.2) v1(31.4,27.2) v1(32.8,27.2) 34.1,27.2 cw(c34.1,26.1) 35.2,26.1 v1(35.2,25.5) v1(35.2,24.3) 35.048,24.148 35.048,23.448 v2(35,23.4) v1(35,22.25) v1(35,21) 35,20.083 cw(c33.634,20.083) 35,20.075 ; v1(3.9,1) v1(5,1) ; v1@5.013,0.987 v1@6.462,0.987 ; v1@6.488,0.987 v1@7.987,0.987 ; v1@8.013,0.987 v1@9.487,0.987 ; v1@9.513,0.987 v1@10.987,0.987 ; v1@11.013,0.987 v1@12.487,0.987 ; v1@12.513,0.987 v1@13.987,0.987 ; v1@14.013,0.987 v1@15.487,0.987 ; v1@15.513,0.987 v1@16.987,0.987 ; v1@17.013,0.987 v1@18.487,0.987 ; v1@18.513,0.987 v1@19.987,0.987 ; v1@20.013,0.987 v1@21.487,0.987 ; v1@21.513,0.987 v1@22.987,0.987 ; v1@23.013,0.987 v1@24.487,0.987 ; v1@24.513,0.987 v1@25.987,0.987 ; v1@26.013,0.987 v1@27.487,0.987 ; v1@27.513,0.987 v1@28.987,0.987 ; v1@29.013,0.987 v1@30.487,0.987 ; v1@30.513,0.987 v1@31.987,0.987 ; v1@32.013,0.987 v1@33.487,0.987 ; v1(33.5,1) 34.304,1 ccw(c34.304,2.196) 35.5,2.196 v1(35.5,2.5) v1(35.5,6.8) cw(c35.5,7.655) 34.645,7.655 IC3.NC@34.645,8.175 ; v1@34.612,10.938 v1(34.6,10.95) ; v1@34.613,13.313 v1(34.6,13.3) ; v1@34.613,14.113 v1(34.6,14.1) ; v1@34.613,14.913 v1(34.6,14.9) ; v1@34.613,17.313 v1(34.6,17.3) ; v1@34.619,12.519 v1(34.613,12.513) ; IC3.PGND@34.62,20.025 34.62,20.05 34.645,20.075 35,20.075 ; 34.761,18.925 cw(c34.761,19.086) 34.6,19.086 ; IC3.PGND@35.57,8.175 34.67,8.175 34.62,8.225 34.6,8.245 34.6,9.341 v1(34.595,9.346) v1(34.595,9.346) 34.597,10.097 v1(34.625,10.125) 34.6,10.15 v1(34.6,10.95) ; IC3.PGND@35.57,20.075 35,20.075 ; v1(34.6,10.95) v1(34.6,11.7) 34.606,11.706 34.606,12.506 v1(34.613,12.513) ; v1(34.6,13.3) v1(34.6,14.1) ; v1(34.6,13.3) 34.6,12.525 v1(34.613,12.513) ; v1(34.6,14.1) v1(34.6,14.9) ; v1(34.6,14.9) 34.6,15.7 v1(34.625,15.725) 34.613,15.738 v1(34.613,16.513) 34.6,16.525 v1(34.6,17.3) ; v1(34.6,17.3) 34.589,17.311 34.589,18.089 v1(34.613,18.113) 34.6,18.125 34.6,19.086 ; 34.6,19.086 ccw(c33.556,20.083) 35,20.075
  VCC w0.4: v2(2.5,1) 2.5,2.605 J1.9 v2(2.52,3.925) ; v2(2.5,24.1) 2.5,25.465 J1.1 2.5,25.505 v2(2.5,27.2)
  BOT w0.25: v1(11,18.8) 11,18.357 ; IC1.1 11.146,16.875 11,17.022 11,17.4 ; IC1.2 11.025,17.375 11,17.4 ; IC1.3 11.025,17.875 11,17.9 ; IC1.4 11.902,18.357 11,18.357 ; IC1.7 14.745,17.4 15.395,17.4 15.605,17.61 15.945,17.61 C3.1 16.123,17.789 16.144,17.768 16.732,17.768 v1(16.75,17.75) ; 11,17.4 11,17.9 ; 11,17.9 11,18.357
  BOT w0.3: R12.1 6.695,19.75 6.695,20.4 v1(6.72,20.425) ; v1(10.7,14.2) 11.331,13.569 11.331,11.972 v3(11.831,11.472) ; IC2.3 v3(11.831,11.472) ; R17.2 12.294,14.353 12.331,14.316 IC2.9 12.331,11.972 v3(11.831,11.472) ; R17.2@12.321,14.494 12.321,15.073 v1(12.348,15.1) ; TP3.1 19.23,12.67 19.23,12.27 v1(19.6,11.9) ; v1(24.25,16.902) 24.288,16.939 24.288,17.562 C11.1 ; v2(27.284,16.604) 27.292,16.612 27.292,17.692 IC4.2 ; v3(27.5,5.5) 27.7,5.7 IC6.3 27.7,8.255 27.628,8.328 v1(27.628,9.105) ; C16.1@29.355,9.795 29.49,9.66 C16.1 ; C16.1@29.51,9.66 29.617,9.66 29.635,9.678 30.16,9.678 30.365,9.883 30.365,9.938 30.515,10.088 C17.2 30.589,10.137 30.589,10.799 30.75,10.959 v1(30.75,11) ; R27.2 v1(35.5,3.4) ; R29.1 v1(35.5,5.4)
  BOT w0.35: v2(23.221,18.979) 23.269,18.931 23.975,18.931 24.075,18.831 D3.2 ; D3.2@24.157,18.855 24.157,19.007 24.552,19.402 24.552,19.952 v2(24.6,20) 24.6,20.045 25.03,20.475 J3.A1/B12 ; C15.1 32.538,7.853 32.963,7.429 33.271,7.429 v1(33.3,7.4) ; C14.2 33.125,8.95 33.125,9.234 33.307,9.417 v1(33.307,9.457)
  BOT w0.4: R19.1 31.37,18.134 31.348,18.111 31.412,18.047 31.412,17.425 v2(31.45,17.387) ; R19.1@31.43,19.27 J3.B1/A12
  BOT w0.5: v1@3.892,1 v2(2.5,1) 1.9,1 cw(c1.9,1.988) 0.912,1.988 0.912,2.688 v1(0.9,2.7) v1(0.9,4.45) v1(0.9,5.95) v1(0.9,7.45) v1(0.9,8.95) v1(0.9,10.45) v1(0.9,11.95) v1(0.9,13.45) v1(0.9,14.95) v1(0.9,16.45) v1(0.9,17.95) v1(0.9,19.45) v1(0.9,20.95) v1(0.9,22.45) v1(0.9,23.95) v1(0.9,25.45) 0.9,26.2 cw(c1.9,26.2) 1.9,27.2 v2(2.5,27.2) v1(4.4,27.2) v1(6.2,27.2) v1(7.9,27.2) v1(9.4,27.2) v1(10.9,27.2) v1(12.4,27.2) v1(13.9,27.2) v1(15.4,27.2) v1(16.9,27.2) v1(18.4,27.2) v1(19.9,27.2) v1(21.4,27.2) v1(23.7,27.2) v1(25.1,27.2) v1(26.6,27.2) v1(27.85,27.2) v1(30,27.2) v1(31.4,27.2) v1(32.8,27.2) 34.1,27.2 cw(c34.1,26.1) 35.2,26.1 v1(35.2,25.5) v1(35.2,24.3) 35.048,24.148 35.048,23.448 v2(35,23.4) v1(35,22.25) v1(35,21) 35,19.531 cw(c33.677,19.531) 34.613,18.596 v1(34.613,18.113) 34.589,18.089 34.589,17.311 v1(34.6,17.3) ; v1(3.9,1) v1(5,1) ; v1@5.013,0.987 v1@6.462,0.987 ; v1@6.488,0.987 v1@7.987,0.987 ; v1@8.013,0.987 v1@9.487,0.987 ; v1@9.513,0.987 v1@10.987,0.987 ; v1@11.013,0.987 v1@12.487,0.987 ; v1@12.513,0.987 v1@13.987,0.987 ; v1@14.013,0.987 v1@15.487,0.987 ; v1@15.513,0.987 v1@16.987,0.987 ; v1@17.013,0.987 v1@18.487,0.987 ; v1@18.513,0.987 v1@19.987,0.987 ; v1@20.013,0.987 v1@21.487,0.987 ; v1@21.513,0.987 v1@22.987,0.987 ; v1@23.013,0.987 v1@24.487,0.987 ; v1@24.513,0.987 v1@25.987,0.987 ; v1@26.013,0.987 v1@27.487,0.987 ; v1@27.513,0.987 v1@28.987,0.987 ; v1@29.013,0.987 v1@30.487,0.987 ; v1@30.513,0.987 v1@31.987,0.987 ; v1@32.013,0.987 v1@33.487,0.987 ; v1(33.5,1) 34.304,1 ccw(c34.304,2.196) 35.5,2.196 v1(35.5,2.5) v1(35.5,3.4) v1(35.5,5.4) v1(35.5,6.8) cw(c35.5,7.705) 34.595,7.705 v1(34.595,9.346) v1(34.595,9.346) 34.597,10.097 v1(34.625,10.125) 34.6,10.15 v1(34.6,10.95) ; v1@34.612,10.938 v1(34.6,10.95) ; v1@34.613,13.313 v1(34.6,13.3) ; v1@34.613,14.113 v1(34.6,14.1) ; v1@34.613,14.913 v1(34.6,14.9) ; v1@34.613,17.313 v1(34.6,17.3) ; v1@34.619,12.519 v1(34.613,12.513) ; v1(34.6,10.95) v1(34.6,11.7) 34.606,11.706 34.606,12.506 v1(34.613,12.513) ; v1(34.6,13.3) 34.6,12.525 v1(34.613,12.513) ; v1(34.6,13.3) v1(34.6,14.1) ; v1(34.6,14.1) v1(34.6,14.9) ; v1(34.6,14.9) 34.6,15.7 v1(34.625,15.725) 34.613,15.738 v1(34.613,16.513) 34.6,16.525 v1(34.6,17.3)
  other v1: 6.475,1 8,1 9.5,1 11,1 12.5,1 14,1 15.5,1 17,1 18.5,1 20,1 21.5,1 23,1 24.5,1 26,1 27.5,1 29,1 30.5,1 32,1 35.036,1.274 1.1,1.4 11.22,1.725 14.22,1.725 18.72,1.725 21.72,1.725 23.22,1.725 24.72,1.725 26.22,1.725 30.72,1.725 32.22,1.725 33.72,1.725 8.97,3.225 16.47,3.225 22.47,3.225 23.97,3.225 14,3.6 35.5,4.4 16.6,4.7 19.3,4.7 14.22,4.725 9.2,5.3 23.4,6.4 14.22,7.725 9.1,8.1 34.6,8.2 26.6,10.8 19.6,11.2 18.6,11.9 9.1,12 10,12 14.7,12 15.75,12.003 16.4,12 17.1,12 9.9,13.1 18.6,13.3 13.6,13.5 6.72,13.725 26.6,13.8 4.47,15.225 19.5,15.7 17.6,16.9 29.324,17.366 32.175,17.7 22.056,17.744 10,18.8 32.175,19.2 20.1,19.5 17.22,19.725 18.72,19.725 21.3,20.5 2.97,21.225 19.47,21.225 20.97,21.225 27.3,22.7 29.2,22.7 2.22,22.725 3.72,22.725 6.72,22.725 9.72,22.725 14.22,22.725 15.72,22.725 21.72,22.725 31.1,22.9 19,23.1 26,23.3 7.47,24.225 1.2,26.9
  other v2: 33.99,23.4
  other v3: 27.5,4 29,4 28.25,4.75 29,5.5 28.6,12.1 13.32,17.625
IO0: IC3.12 J1.8 | length 12.2
  TOP w0.2: v1(23.327,17.6) 24.652,18.925 IC3.12 IC3.12@25.733,18.913
  TOP w0.25: J1.8 20.43,25.355 20.43,20.37 v1(20.979,19.821)
  VCC w0.2: v1(20.979,19.821) 21.042,19.821 23.263,17.6 v1(23.327,17.6)
IO1: IC3.13 J1.16 R2.1 R8.2 | length 19.1
  TOP w0.2: J1.16 20.3,5.729 R8.2 R2.1 20.41,6.78 21.102,7.472 21.102,9.798 20.6,10.3 20.6,14.557 22.943,16.9 23.334,16.9 24.559,18.125 IC3.13
IO2: IC3.5 J1.15 R3.1 R9.2 | length 28.9
  TOP w0.2: R9.2 R9.2@17.76,5.774 ; J1.15 R9.2@17.76,5.774 ; IC3.5 31.42,19.417 30.703,18.7 28.113,18.7 27.39,19.424 24.443,19.424 20.1,15.081 20.1,10.2 20.6,9.7 20.6,8.5 20.2,8.1 19.028,8.1 18.549,7.621 18.07,7.142 18.07,6.98 17.87,6.78 R3.1 17.795,5.809 R9.2@17.76,5.774
IO8: IC3.22 R13.2 TP4.1 | length 5.1
  TOP w0.2: TP4.1 22.998,12.702 22.998,11.627 23.575,11.05 R13.2@23.575,10.975
  TOP w0.3: R13.2 23.575,10.975 25.67,10.975 IC3.22
IO12: IC3.17 TP11.1 | length 2.3
  TOP w0.2: TP11.1 24.025,14.925 IC3.17
IO13: IC3.18 TP12.1 | length 2.5
  TOP w0.2: TP12.1 24.425,14.125 IC3.18
MISO: IC3.29 J1.4 | length 37.9
  TOP w0.2: IC3.29 29.82,8.92 30,9.1 30,10.943 v1(30.041,10.984)
  VCC w0.2: v1(21.25,24.25) 22.1,25.1 29,25.1 30.5,23.6 30.5,21.632 30.9,21.232 30.9,17.107 30.028,16.235 30.028,10.997 v1(30.041,10.984)
  BOT w0.25: J1.4 11.4,24.225 21.225,24.225 v1(21.25,24.25)
MOSI: IC3.28 J1.3 | length 40.3
  TOP w0.2: IC3.28 29.01,8.235 29.01,8.81 29.396,9.196 29.396,10.954 v1(29.35,11)
  VCC w0.2: v1(21.5,23.6) 22.6,24.7 28.8,24.7 30.1,23.4 30.1,21.527 30.5,21.127 30.5,17.227 29.6,16.327 29.6,11.267 29.35,11.017 v1(29.35,11)
  BOT w0.25: J1.3 9.46,23.625 21.475,23.625 v1(21.5,23.6)
NetC12_1: C12.1 J3.S1 J3.S2 J3.S3 J3.S4 R20.1 | length 24
  BOT w0.4: J3.S1 22.52,21.925 22.52,24.655 23.69,25.825 32.77,25.825 J3.S4 ; J3.S2@33.75,21.735 J3.S2 ; J3.S4@33.75,24.845 J3.S4 ; C12.1 R20.1 33.97,21.325 J3.S2 ; J3.S2 J3.S4
NetD1_1: D1.1 SB1.1 | length 20.8
  GND w0.4: v2(4.5,13.3) 6.9,15.7 18.35,15.7 v2(19.55,14.5)
  BOT w0.4: v2(4.5,13.3) 4.5,12.3 SB1.1 ; v2(19.55,14.5) 20.296,13.754 20.85,13.2 D1.1
NetIC2_2: IC2.2 L1.2
NetIC2_4: IC2.4 L1.1
NetIC2_6: IC2.6 R7.1 | length 2.1
  BOT w0.25: R7.1 9.725,14.5 9.9,14.325 9.9,14.178 10.806,13.272 10.806,12.997 IC2.6
NetIC3_25: IC3.25 R6.1 | length 9.2
  TOP w0.2: IC3.25 26.72,8.325 26.72,8.71 v1(26.99,8.98)
  TOP w0.3: v1(24.8,2.4) R6.1
  GND w0.2: v1(24.8,2.4) 24.8,6.79 v1(26.99,8.98)
NetIC6_8: IC6.8 R28.2 R29.2 | length 3.1
  BOT w0.222: IC6.8 30.575,6.375 R28.2@32.625,6.375 ; R29.2 32.65,6.35 R28.2@32.625,6.375 ; R28.2 R28.2@32.625,6.375
NetIC6_9: IC6.9 R25.1 | length 2.7
  BOT w0.222: IC6.9 30.589,5.811 31.164,5.811 32.575,4.4 R25.1
NetIC6_11: IC6.11 R27.1 | length 2.7
  BOT w0.222: IC6.11 30.589,4.811 31.164,4.811 32.575,3.4 R27.1
NetIC6_25: IC6.25 R26.2 | length 1.5
  BOT w0.222: R26.2 24.525,4.6 24.775,4.85 IC6.25
NetIC6_26: IC6.26 R24.2 | length 1.5
  BOT w0.222: R24.2 24.7,5.35 IC6.26
NetJ3_A5: J3.A5 R18.2 | length 6.8
  VCC w0.25: v1(26.706,21.725) 26.723,21.708 26.723,20.873 v1(29.697,17.899)
  BOT w0.25: v1(26.706,21.725) 26.706,21.686 26.955,21.437 26.955,20.775 J3.A5 ; v1(29.697,17.899) 29.764,17.899 29.816,17.95 30.095,17.95 R18.2
NetJ3_B5: J3.B5 R19.2 | length 1.7
  BOT w0.25: J3.B5 29.98,19.825 ccw(c30.97,19.825) R19.2
NetLED1_2: LED1.2 R6.2 | length 1.3
  TOP w0.3: R6.2 LED1.2
NetQ1_3: Q1.3 Q2.3
NetQ3_2: Q3.2 SB2.1
NetQ4_2: Q4.2 R21.1 | length 2.4
  BOT w0.2: Q4.2 22.05,9.7 22.135,9.7 22.507,10.072 22.507,11.543 R21.1
NetQ4_5: Q4.5 R22.1 | length 2.7
  BOT w0.2: R22.1@23.534,7.316 23.3,7.55 23.3,9.161 23.639,9.5 23.75,9.5 Q4.5
P3V3: C16.2 C17.1 IC6.6 R25.2 | length 11.4
  VCC w0.2: v1(33.807,10.1) 33.807,5.116 v1(34.462,4.462)
  BOT w0.2: C17.1 30.565,8.738 30.79,8.963 30.79,8.988 31.092,9.29 31.092,10.092 31.629,10.629 33.329,10.629 33.807,10.15 v1(33.807,10.1)
  BOT w0.3: R25.2 33.812,4.462 v1(34.462,4.462)
P_GATE1: Q3.1 R14.2 R16.2 | length 8.3
  BOT w0.3: Q3.1 2.612,6.572 2.749,6.71 2.772,6.71 3.513,7.451 3.513,8.113 4.2,8.8 6.3,8.8 7.15,7.95 R14.2 R16.2
P_GATE2: Q1.1 Q2.1 R11.2 R12.2 | length 9.4
  BOT w0.25: R11.2@5.57,18.625 R12.2 5.495,19.725 5.345,19.875 5.345,19.95 4.944,20.351 Q1.1 9.008,20.975 10.723,22.69 10.746,22.69 10.908,22.853 Q2.1
RTS: IC6.24 Q4.1 R22.2 TP8.1 | length 9.6
  BOT w0.2: Q4.1 22,8.95 22.4,8.55 22.4,7.6 22.225,7.425 22.225,7.35 22,7.125 22,6.5 ; TP8.1 22,6.5 ; IC6.24 25.144,4.35 25.027,4.233 25.027,4.216 24.909,4.098 22.402,4.098 22,4.5 22,6.5
RX: IC3.9 J1.13 | length 28.8
  TOP w0.25: J1.13 12.68,11.08 18.8,17.2 19.9,17.2 23.9,21.2 27.3,21.2 28.145,20.355 28.145,20.1 IC3.9
RXD: IC3.31 R26.1 TP10.1 | length 17.9
  TOP w0.2: TP10.1 31.36,6.66 31.36,8.165 IC3.31 31.42,8.425 31.752,8.757 31.835,8.757 33.157,10.08 v1(33.157,10.09)
  VCC w0.2: v1(22.6,4.612) 25.33,4.612 26.992,6.275 29.401,6.275 33.157,10.03 v1(33.157,10.09)
  BOT w0.222: v1(22.6,4.612) 22.606,4.606 23.344,4.606 R26.1
SCK: IC3.27 J1.5 | length 29.1
  TOP w0.2: v1(21.659,14.666) 21.659,14.585 21,13.926 21,10.5 21.7,9.8 21.7,9.1 23.6,7.2 27.395,7.2 28.22,8.025 IC3.27
  VCC w0.2: J1.5 12.68,22.72 18.8,16.6 19.75,16.6 21.659,14.691 v1(21.659,14.666)
SCL: IC1.6 IC3.16 J1.12 R4.1 | length 34.2
  TOP w0.25: J1.12 10.14,5.644 9.845,5.939 9.618,5.939 8.2,7.358 8.2,13.3 13.452,18.552 v1(15.855,18.552) ; v1(22.632,15.361) 22.671,15.4 24.65,15.4 24.975,15.725 IC3.16
  BOT w0.25: IC1.6 14.745,17.9 15.203,17.9 v1(15.855,18.552) ; v1@15.906,18.501 15.983,18.579 15.983,18.583 19.409,18.583 v1(22.632,15.361)
SDA: IC1.5 IC3.15 J1.11 R5.1 | length 34.1
  TOP w0.25: J1.11 7.6,5.744 R5.1 7.545,5.839 7.545,13.645 13.033,19.133 15.525,19.133 v1(15.538,19.12) ; v1(22.75,16) 24.5,16 25.025,16.525 IC3.15
  BOT w0.25: IC1.5 14.87,18.375 15.49,18.995 15.49,19.072 v1(15.538,19.12) ; v1@15.603,19.108 19.642,19.108 v1(22.75,16)
STAB_3V3: C3.2 C5.2 C6.1 C7.1 C8.1 C9.1 C10.2 D2.1 IC1.8 IC2.1 IC3.3 Q2.2 R1.1 R2.2 R3.2 R4.2 R5.2 R13.1 R15.2 TP2.1 | length 28.5
  TOP w0.25: R5.2 6.6,5.684 v1(6.6,5.1) ; R1.1 16.75,22.245 v1(16.75,21.25) ; R3.2 16.7,6.785 v1(16.7,7.6) ; R2.2 v1(19.235,7.6)
  TOP w0.3: R4.2 11.162,5.723 11.162,4.338 v1(11.2,4.3)
  TOP w0.35: R13.1 23.5,12.075 23.846,11.729 24.196,11.729 v1(24.225,11.7)
  GND w0.3: v2(19.2,9.5) v2(20,9.5) 20,7 v2(21.4,5.6)
  VCC w0.3: v1(17.8,14.4) 17.8,10 v1(18.2,9.6)
  VCC w0.35: v2(26,24) v2(26.8,24) ; v2(31.9,23.4) v2(32.69,23.4)
  BOT w0.25: IC1.8 C3.2@16.01,16.875
  BOT w0.3: R15.2 15.96,14.4 v1(17.8,14.4) ; C3.2@16.01,16.875 C3.2@16.04,16.845 ; C3.2 16.27,17.015 16.611,17.015 16.696,17.1 v1(16.75,17.1) ; TP2.1 v2(19.2,9.5)
  BOT w0.35: v2(26.8,24) 27.4,24.6 30.7,24.6 v2(31.9,23.4)
  other v2: 11.92,20.525 11.92,21.225
TX: IC3.10 J1.14 | length 26
  TOP w0.25: J1.14 15.22,8.01 15.225,8.014 15.225,12.717 19.108,16.6 20.028,16.6 24.08,20.652 26.993,20.652 27.42,20.225 IC3.10
TXD: IC3.30 R24.1 TP9.1 | length 17.4
  TOP w0.2: TP9.1 30.62,7.22 IC3.30 30.62,8.425 31.254,9.059 31.666,9.059 32.399,9.792 32.399,10.029 v1(32.457,10.087)
  VCC w0.2: v1(22.574,5.594) 25.294,5.594 26.4,6.7 29.307,6.7 32.399,9.792 32.399,10.029 v1(32.457,10.087)
  BOT w0.222: v1(22.574,5.594) 22.577,5.597 23.347,5.597 R24.1
USB1_N: IC4.3 J3.A7 J3.B7 | length 7.9
  BOT w0.222: J3.B7 27.519,20.789 27.519,21.325 ccw(c27.297,21.325) 27.517,21.355 27.464,21.751 cw(c28.02,21.825) 28.541,21.616 28.457,21.408 ccw(c28.663,21.325) 28.441,21.325 28.441,21.214 J3.A7 ccw(c28.48,20.674) 28.404,20.674 28.404,20 cw(c27.756,20) 27.778,19.352 ccw(c27.788,19.13) 27.625,19.281 27.503,19.149 ccw(c27.667,18.999) 27.445,18.995 27.451,18.731 27.451,18.73 ccw(c27.672,18.735) 27.598,18.526 27.671,18.5 cw(c27.6,18.3) 27.737,18.462 28.061,18.189 IC4.3
USB1_P: IC4.1 J3.A6 J3.B6 | length 7.8
  TOP w0.222: v1(28.054,21.862) cw(c28.492,21.862) 28.492,22.3 28.671,22.3 cw(c28.671,21.829) v1(29.142,21.829)
  BOT w0.222: IC4.1 26.539,18.189 26.863,18.462 cw(c27,18.3) 26.917,18.496 26.966,18.517 ccw(c26.88,18.721) 27.102,18.725 27.097,18.987 cw(c27.667,18.999) 27.244,19.381 cw(c27.503,19.149) 27.247,19.385 27.368,19.517 cw(c27.788,19.13) 27.76,19.7 cw(c27.778,19.352) 27.766,19.7 ccw(c27.756,20) 28.056,20 28.056,20.674 ccw(c27.98,20.674) J3.A6 28,20.77 28,21.325 28.002,21.327 28.002,21.81 v1(28.054,21.862) ; J3.B6 29.019,21.214 29.019,21.325 cw(c29.33,21.325) 29.029,21.405 v1(29.142,21.829)